# Altium PCB gecko3.PcbDoc (part 1 of 8)
Units mm, origin at the board's own origin, x right, y up, seen from the top; angles counter-clockwise.
Board outline 85.5 x 54.02 mm, 10 copper layers (Top Layer, MidLayer1, 1.2 & 2.5V Plane, GND Plane1, DDR layer 1, 3.3V Plane, DDR layer 2, GND Plane2, MidLayer2, Bottom Layer), stack 1.39 mm thick; 295 components, 567 nets, 2310 pads, 1568 vias.
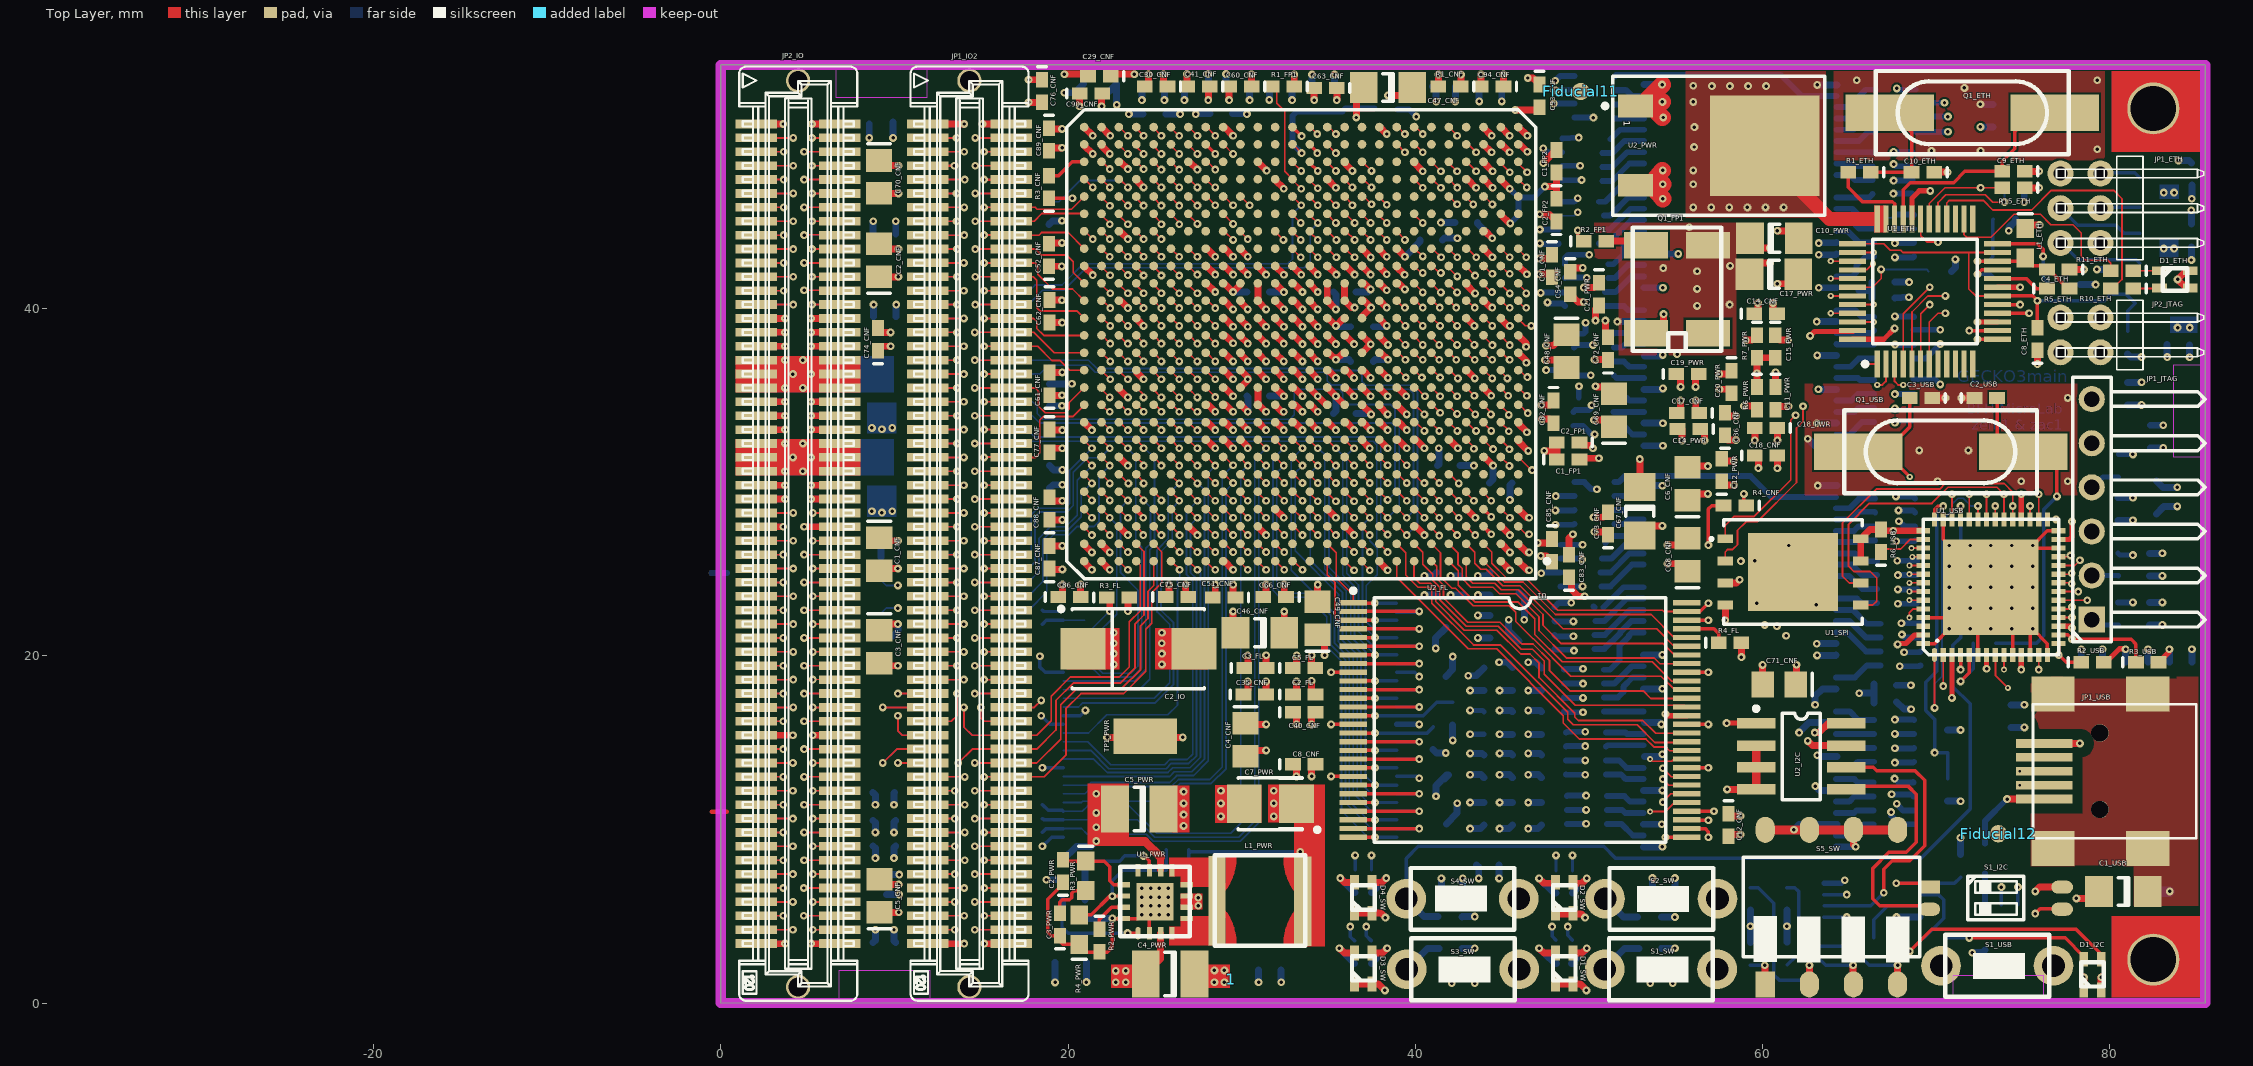
[diagram p0: Top Layer view]
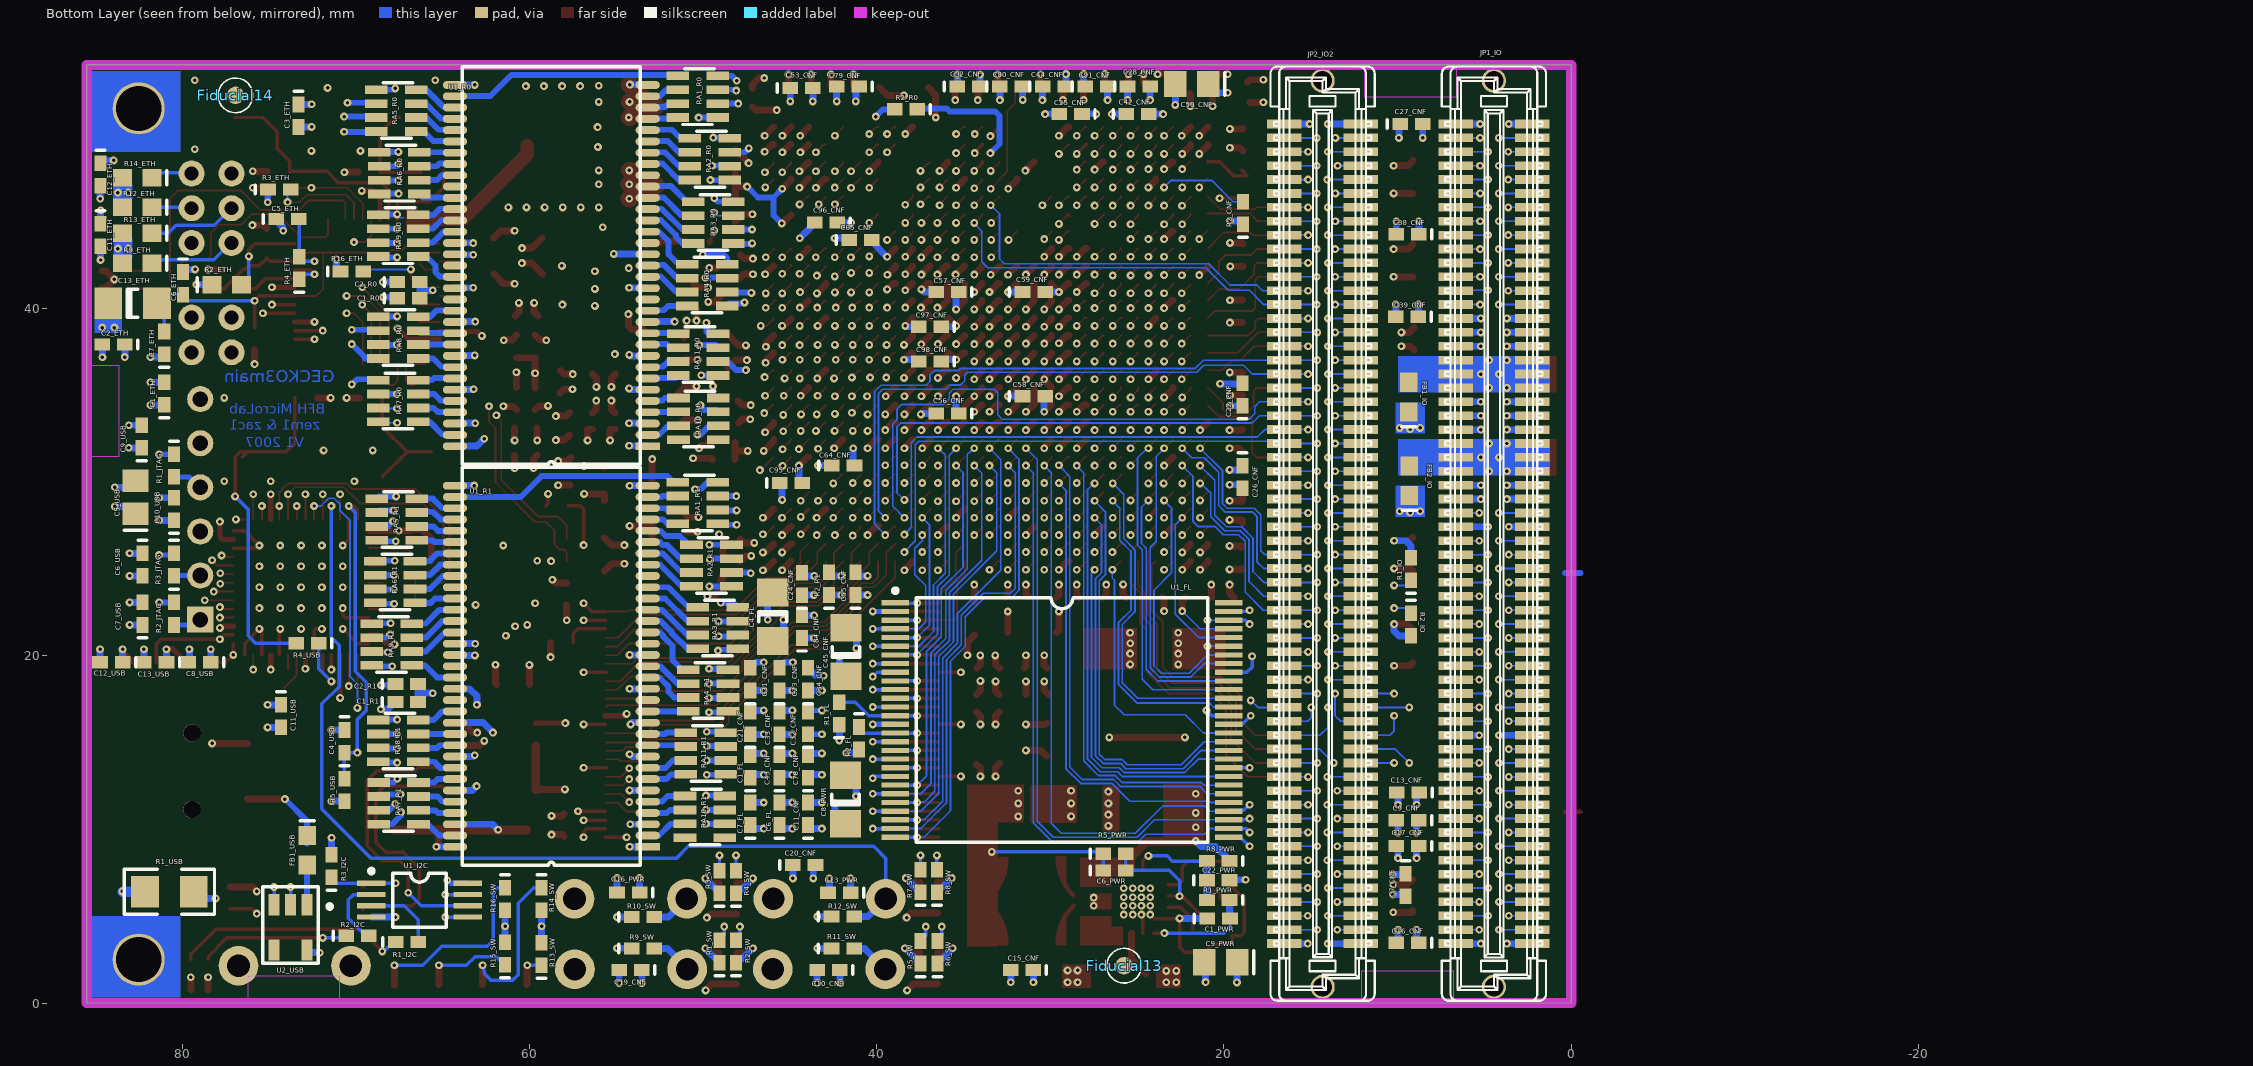
[diagram p1: Bottom Layer view, seen from below]
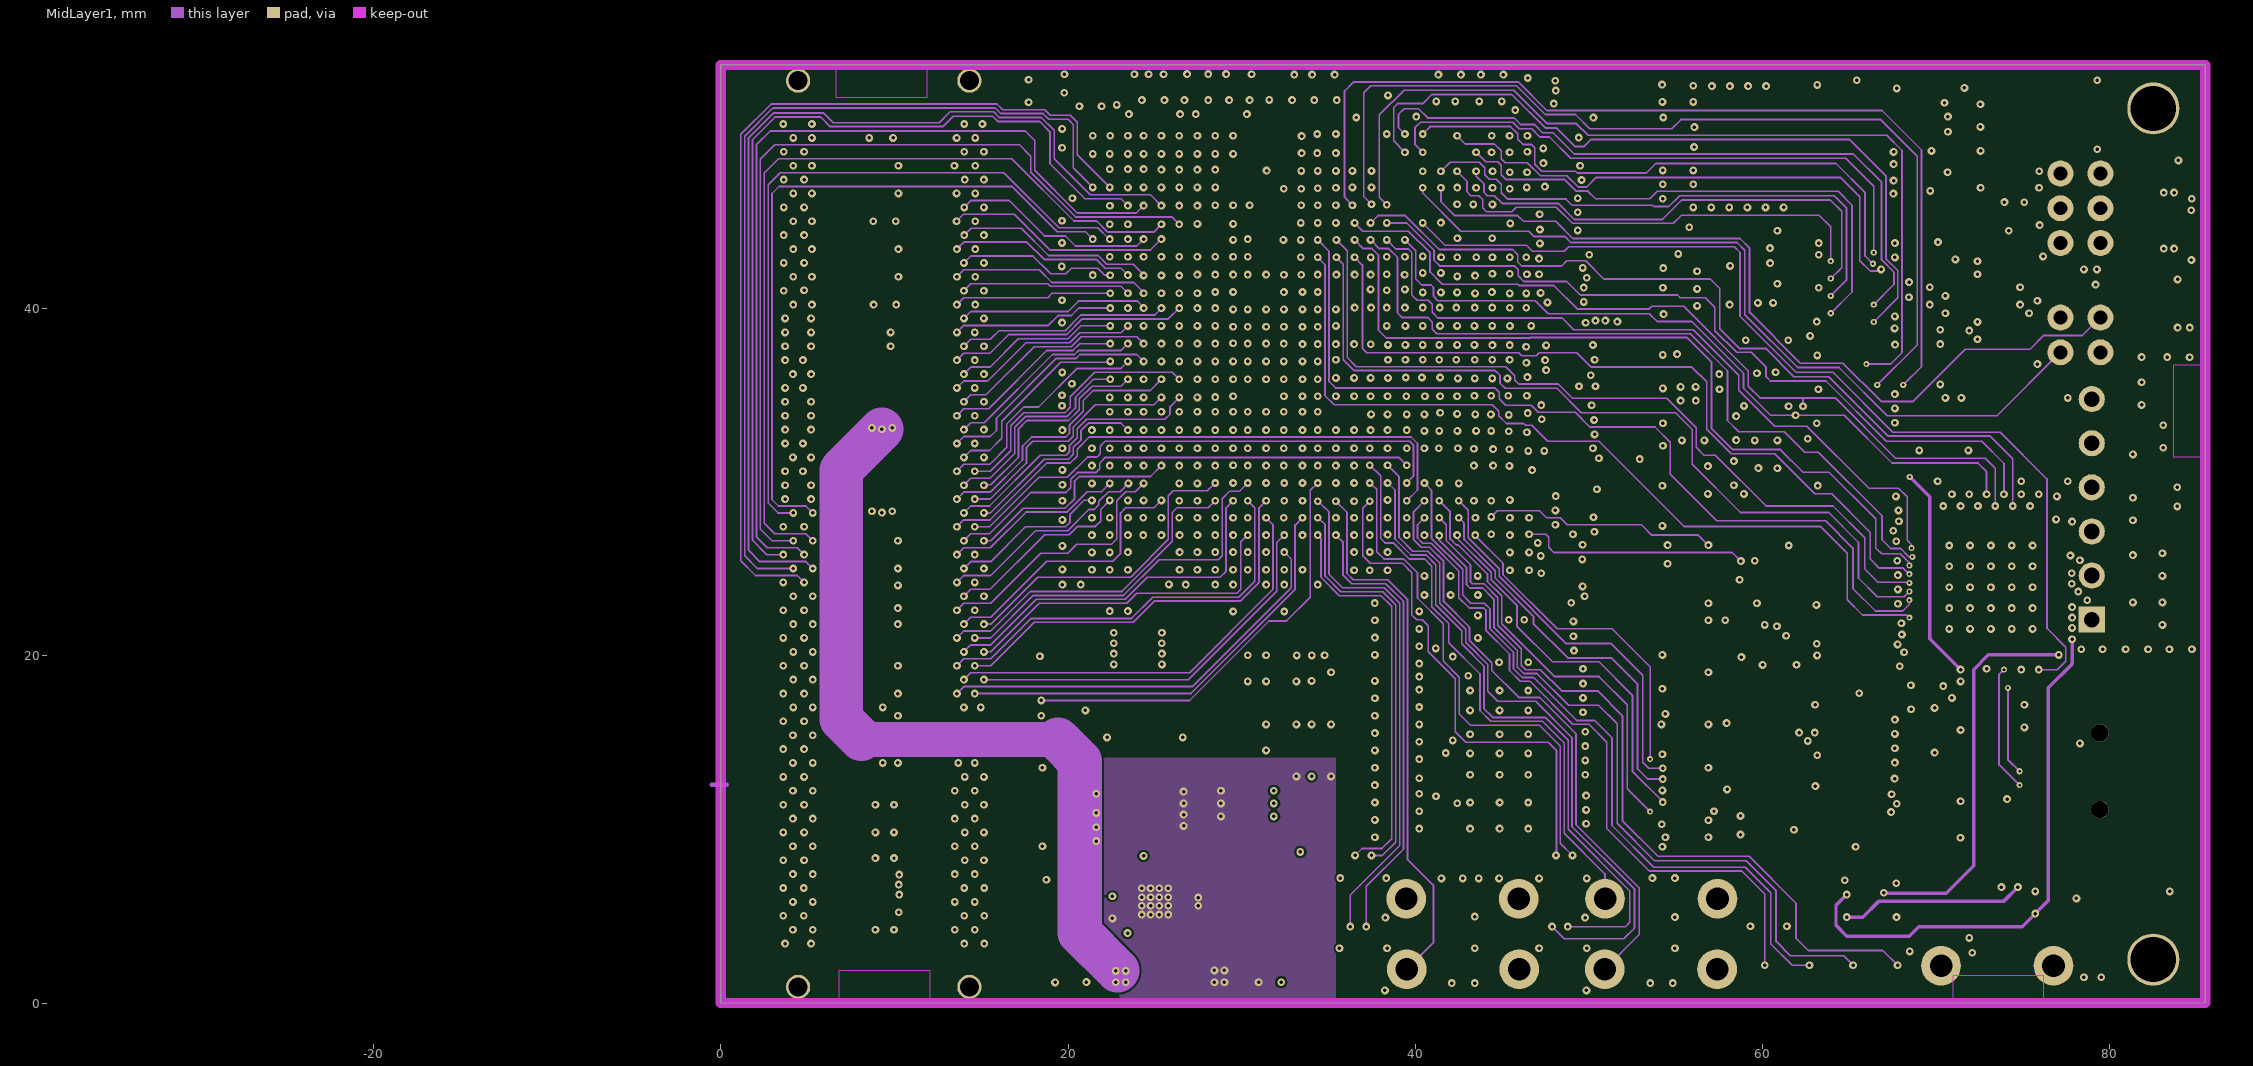
[diagram p2: MidLayer1]
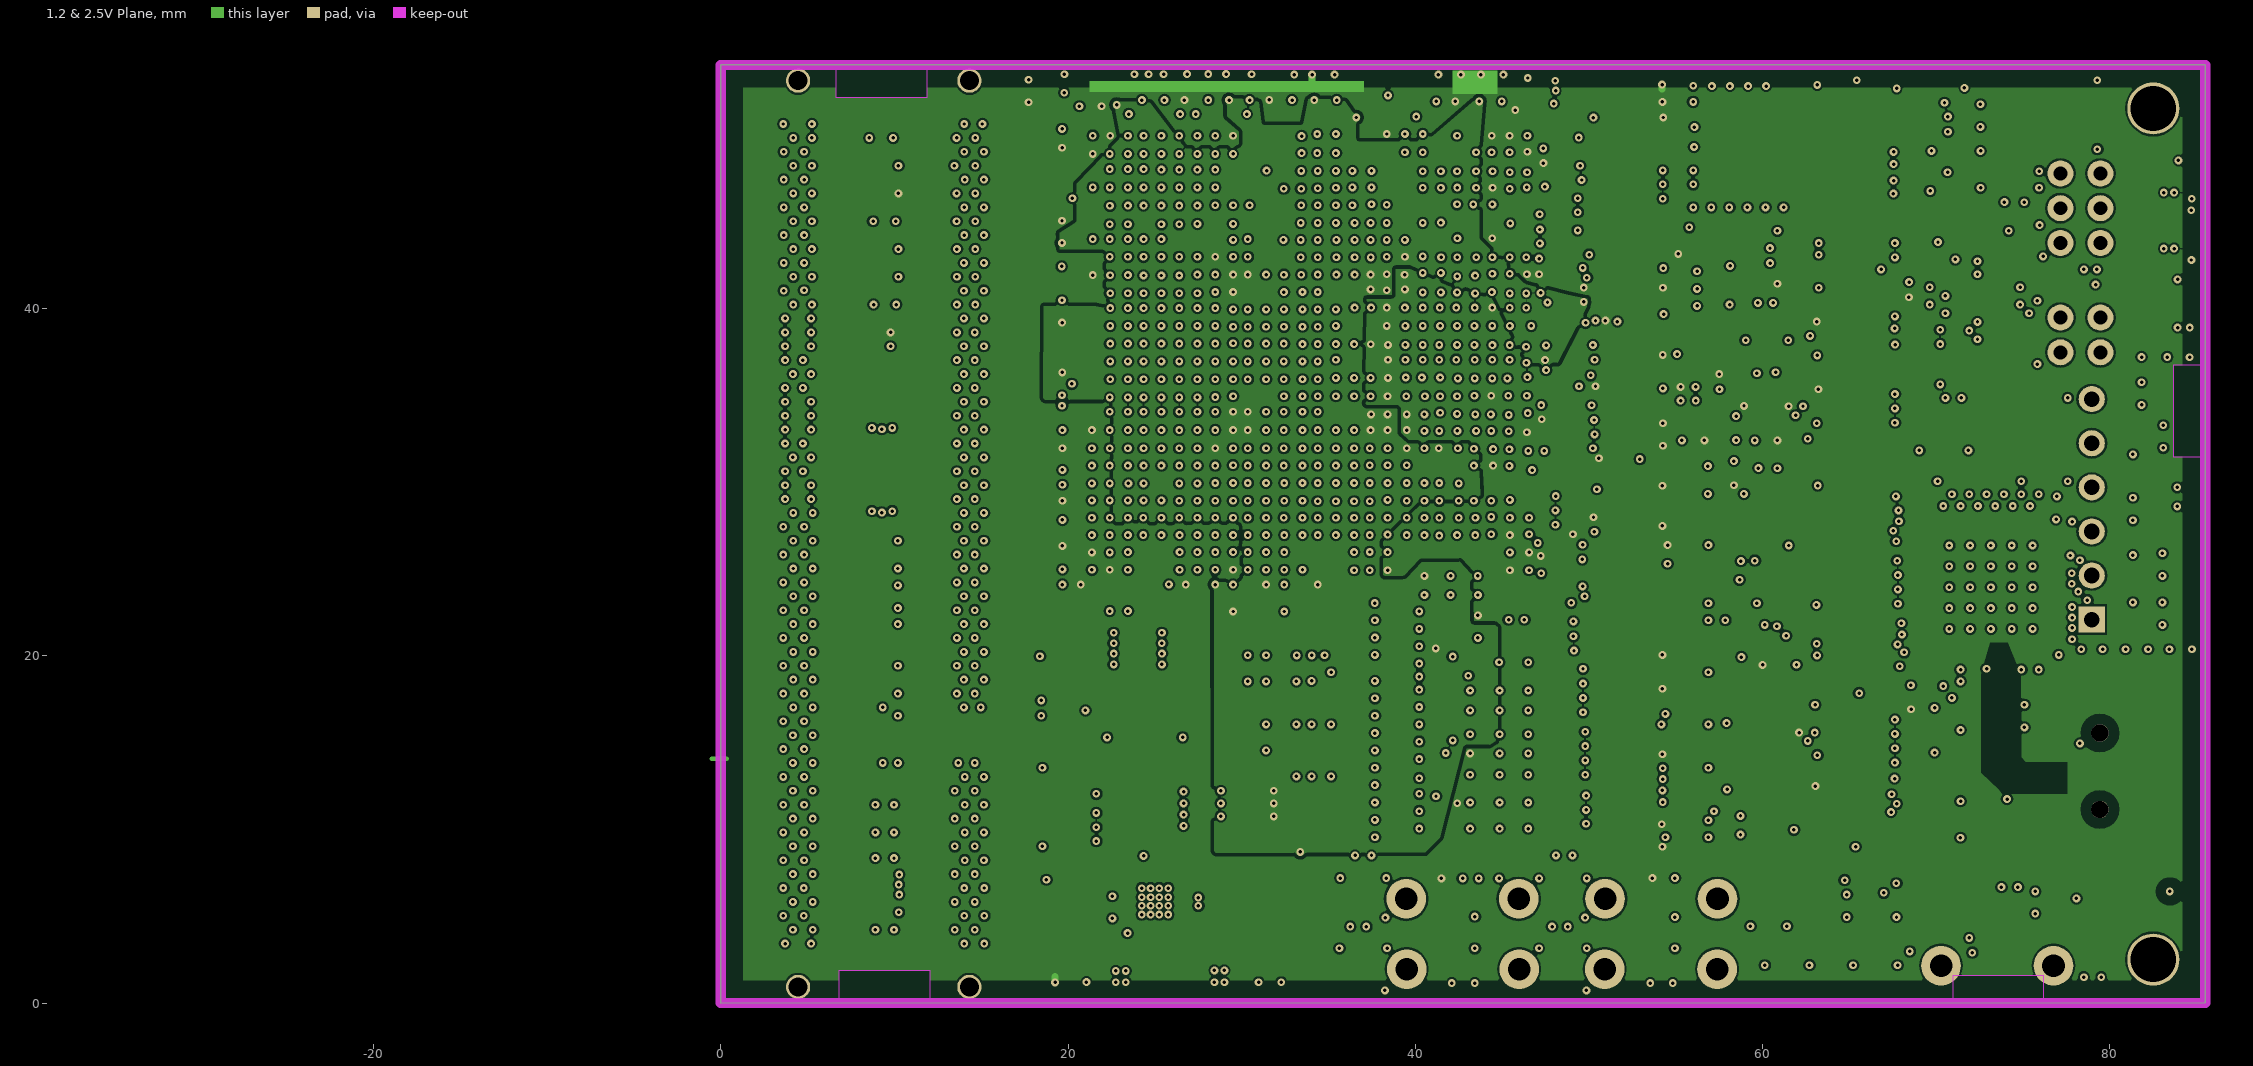
[diagram p3: 1.2 & 2.5V Plane]
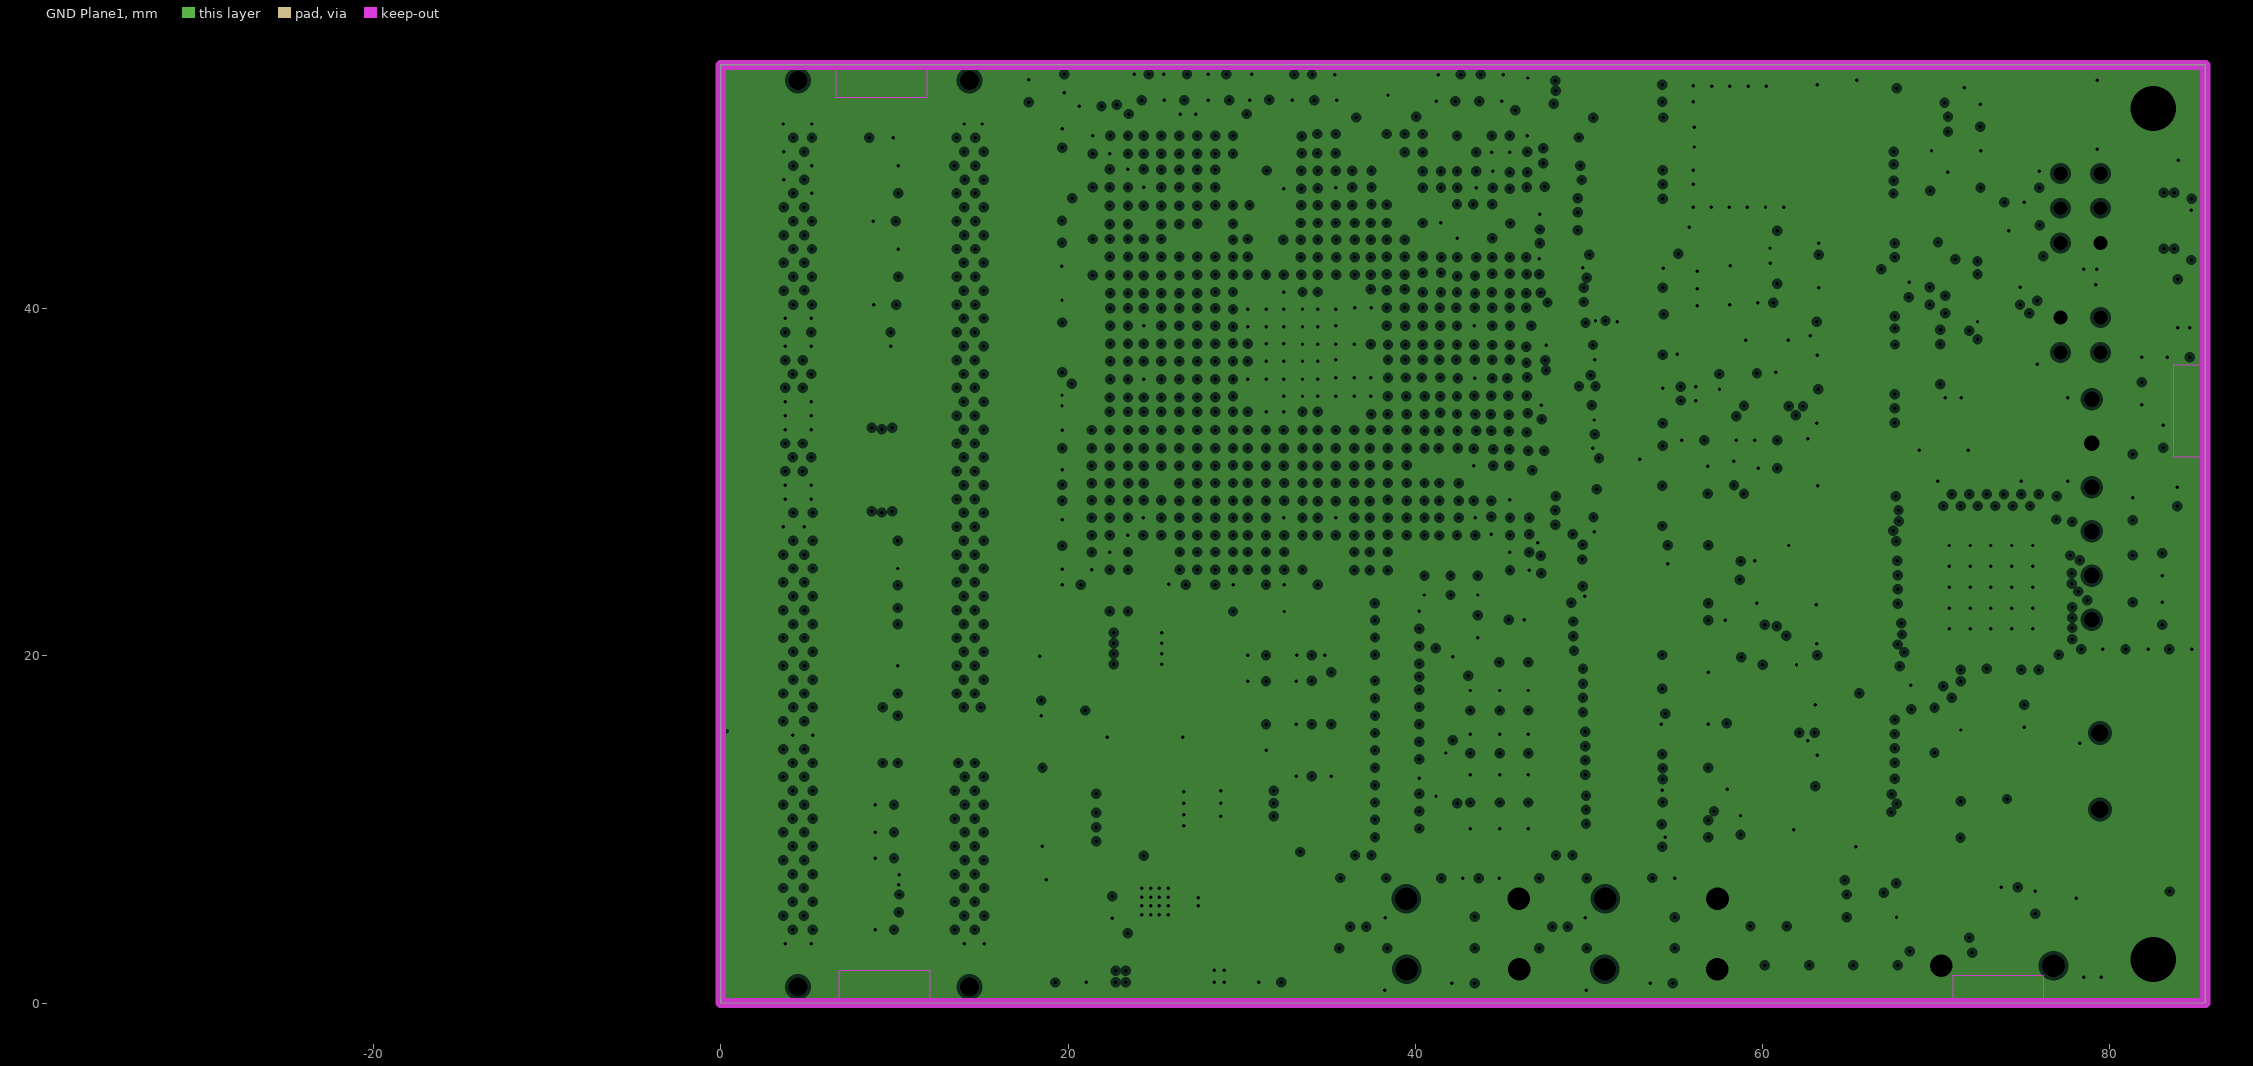
[diagram p4: GND Plane1, clearances drawn from the general rule]
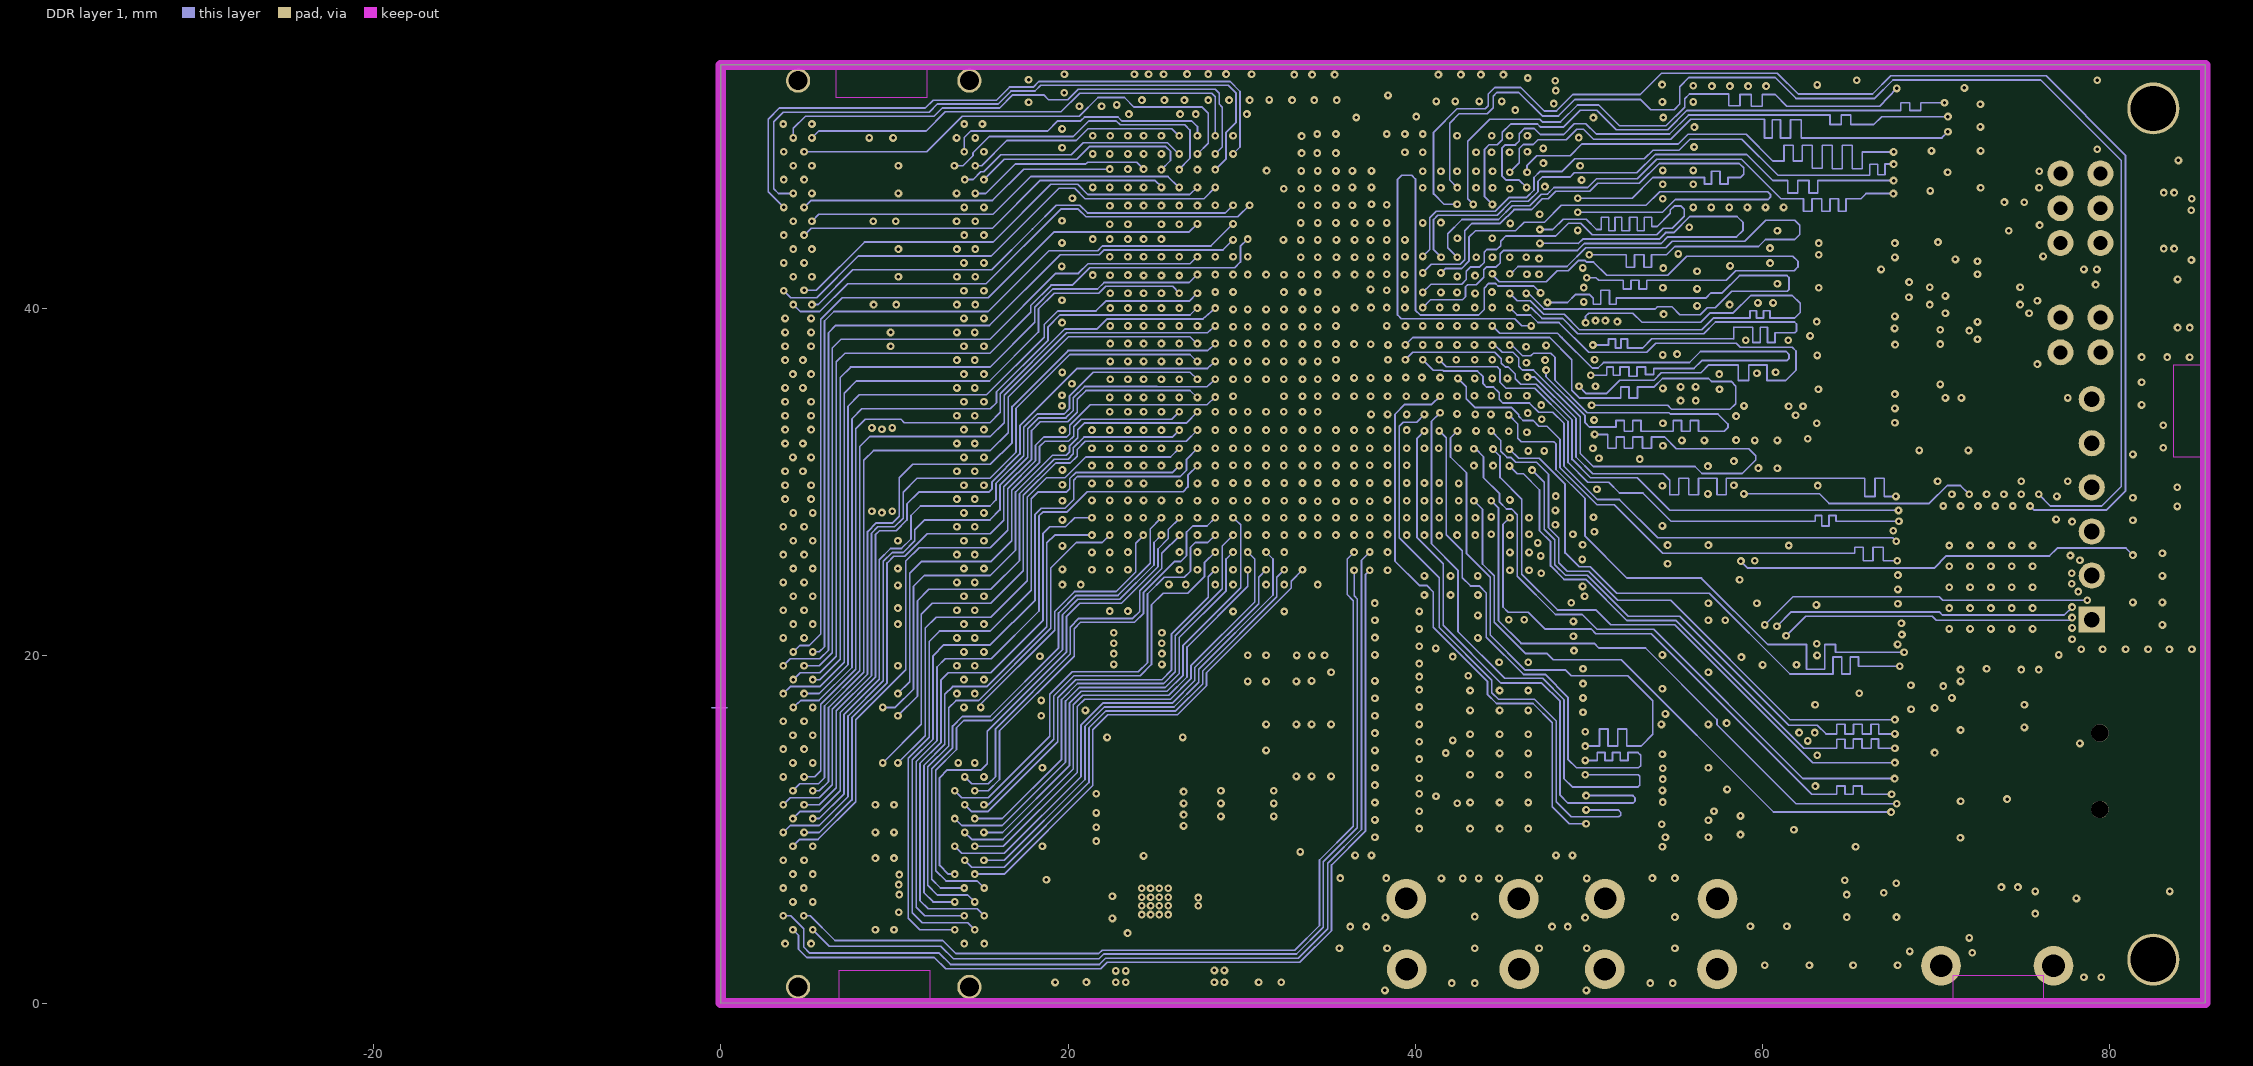
[diagram p5: DDR layer 1]
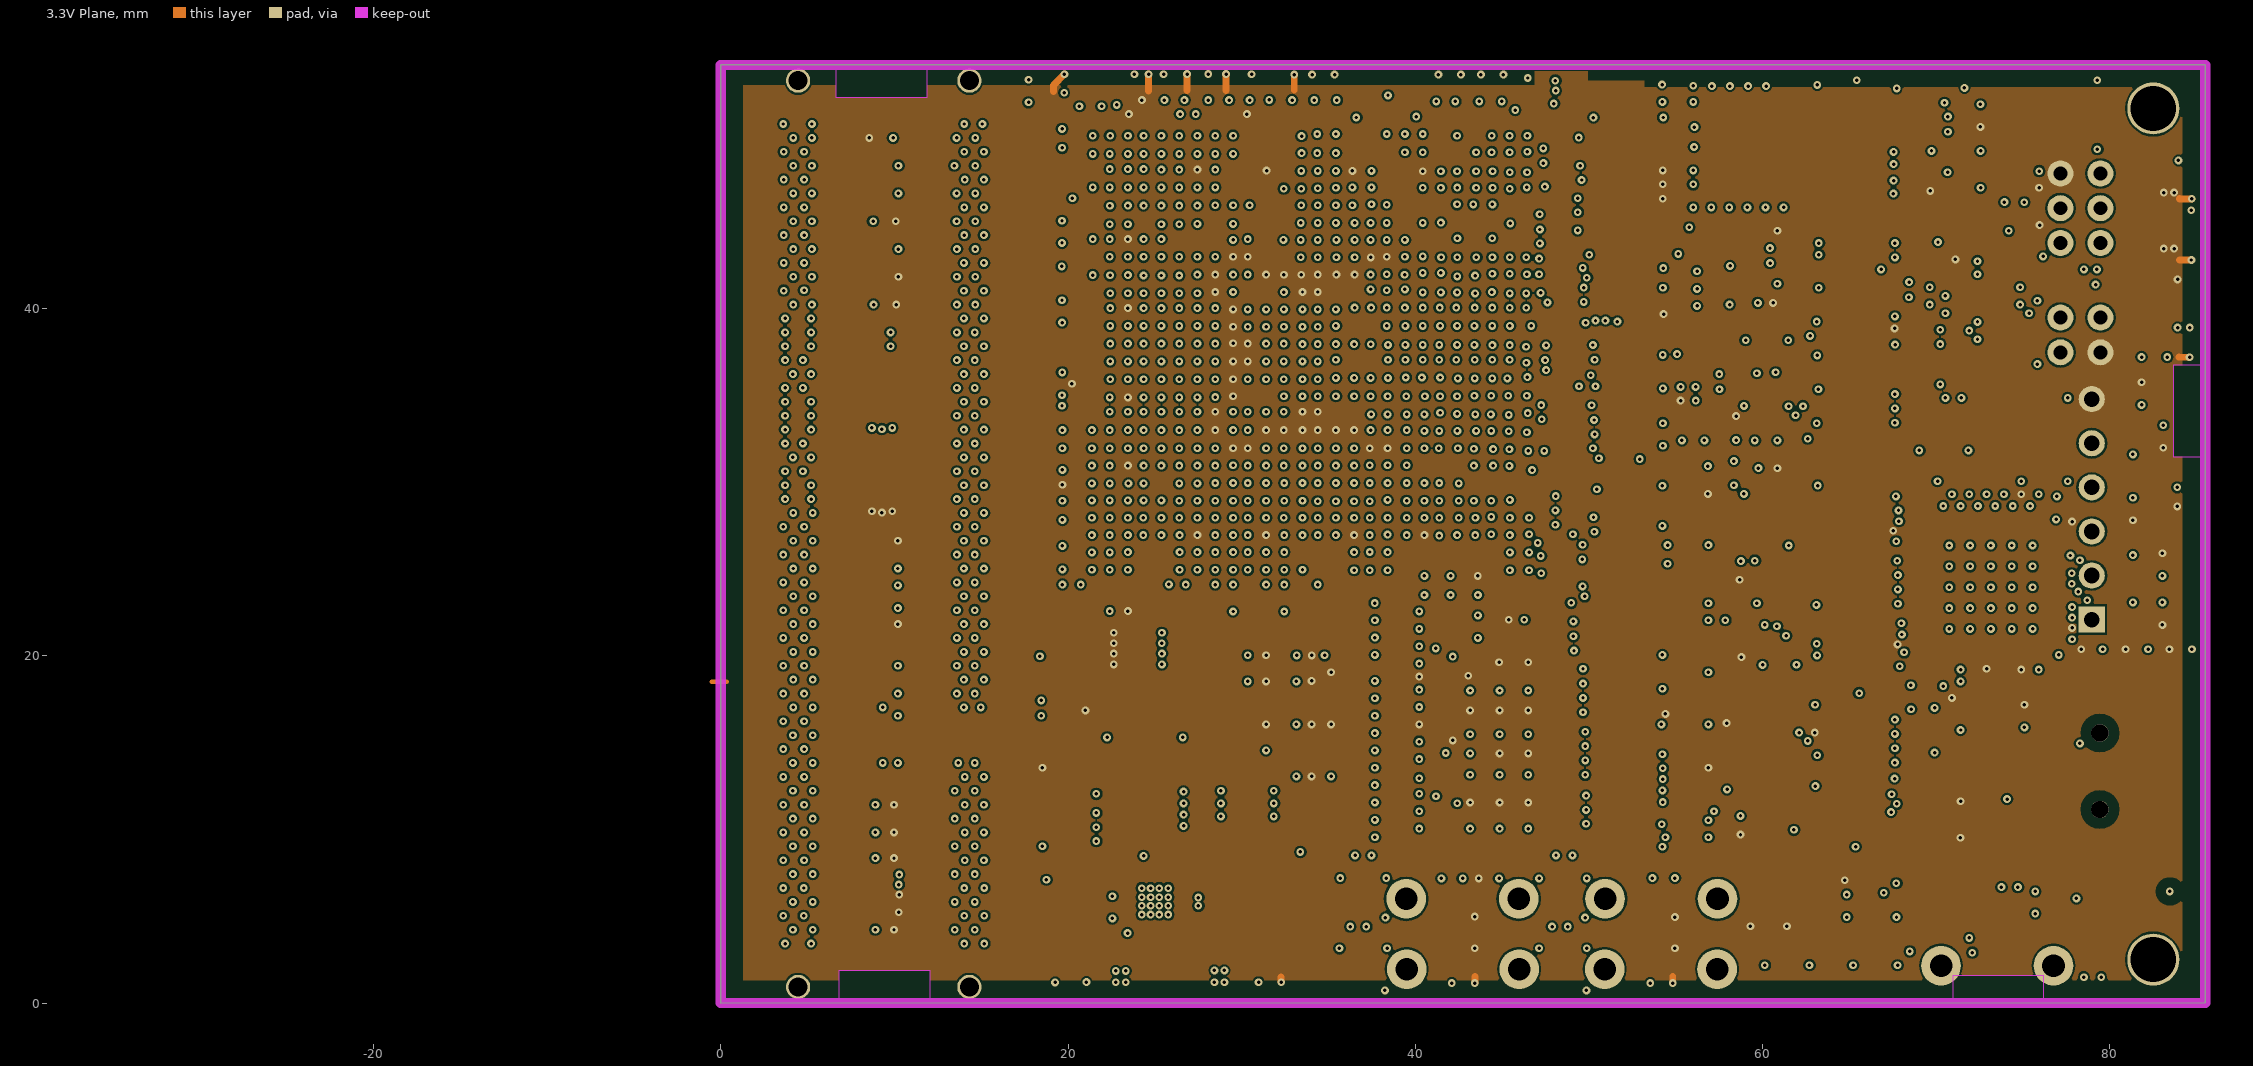
[diagram p6: 3.3V Plane]
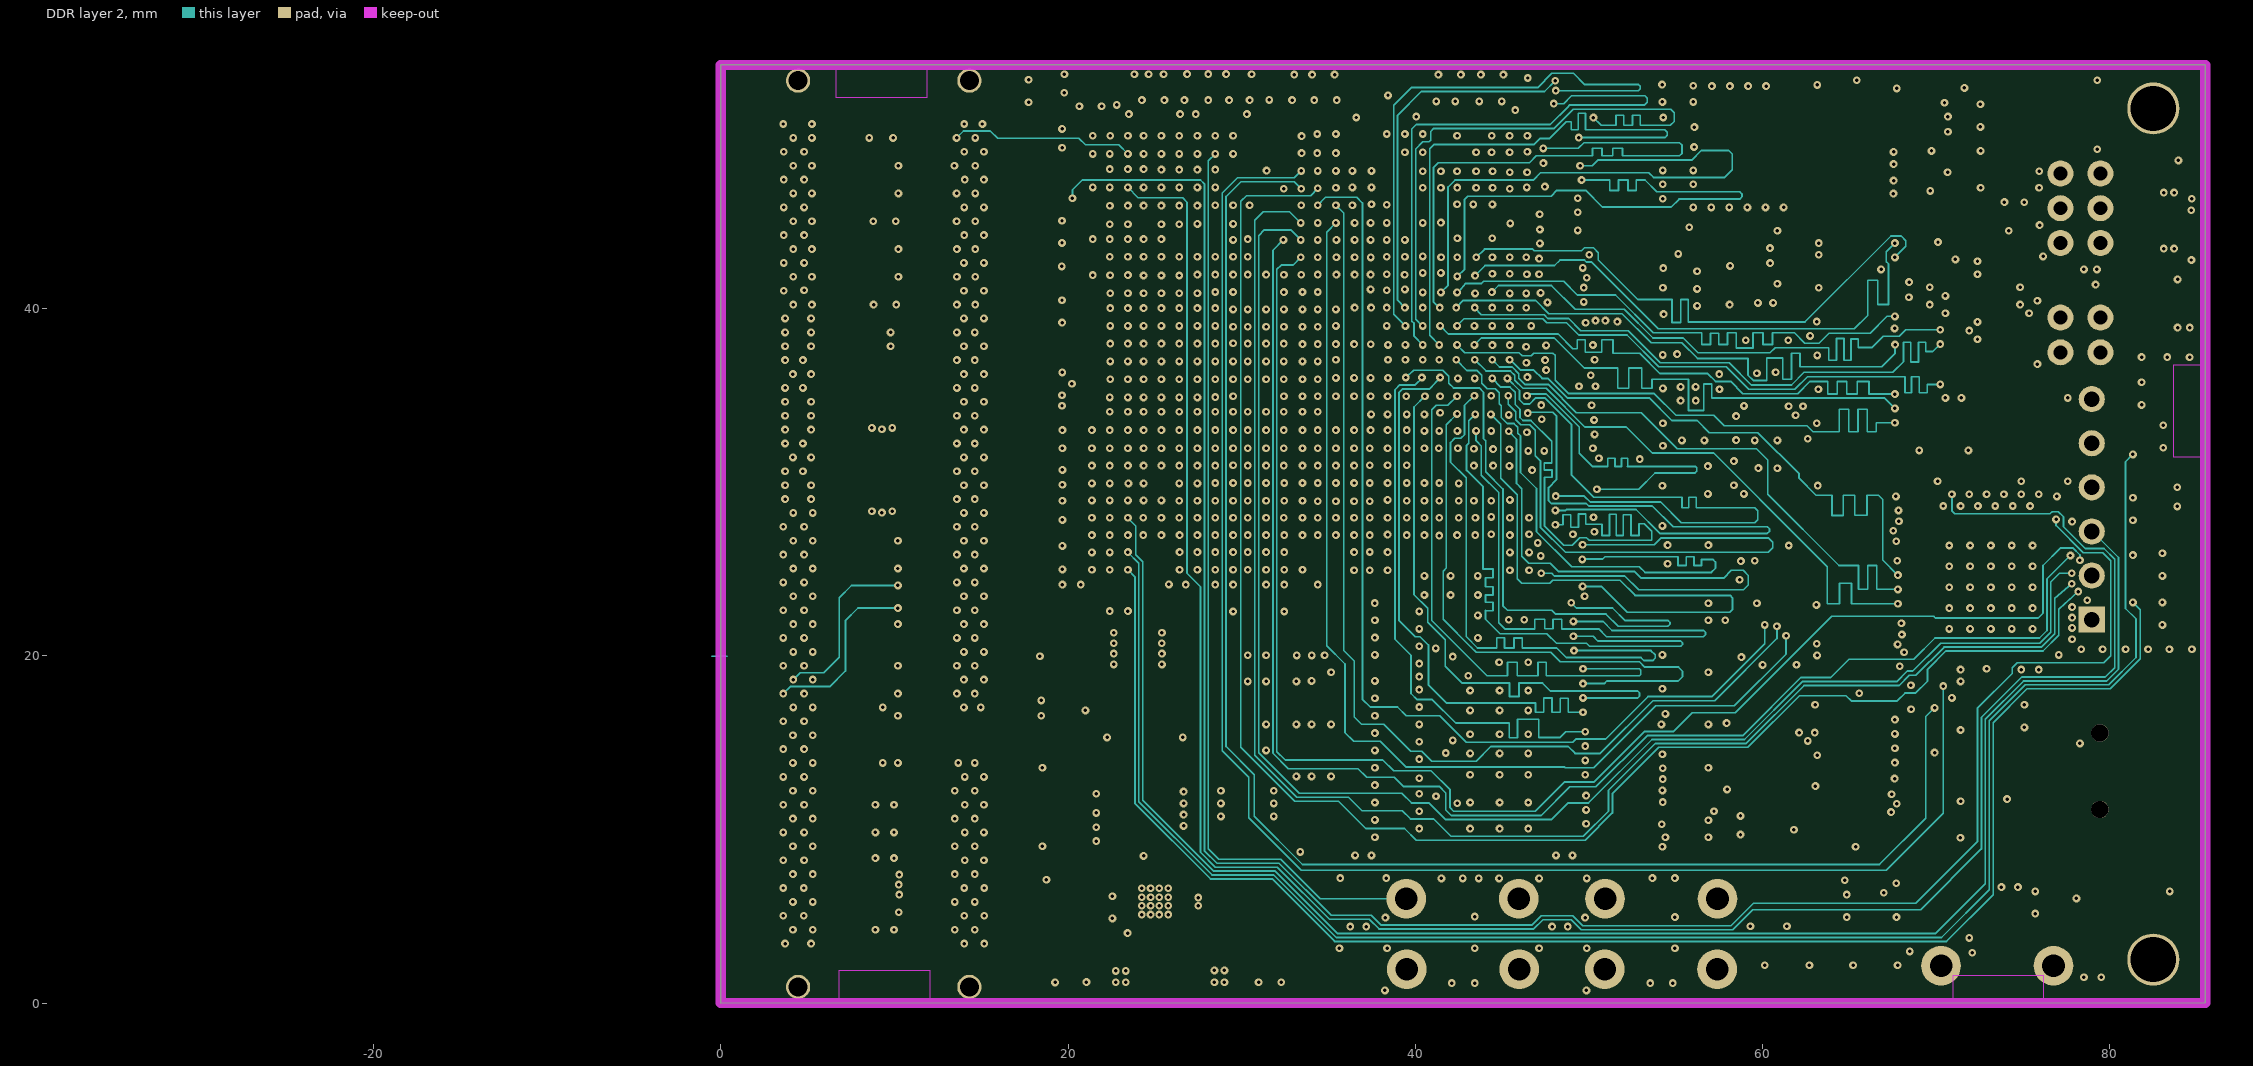
[diagram p7: DDR layer 2]
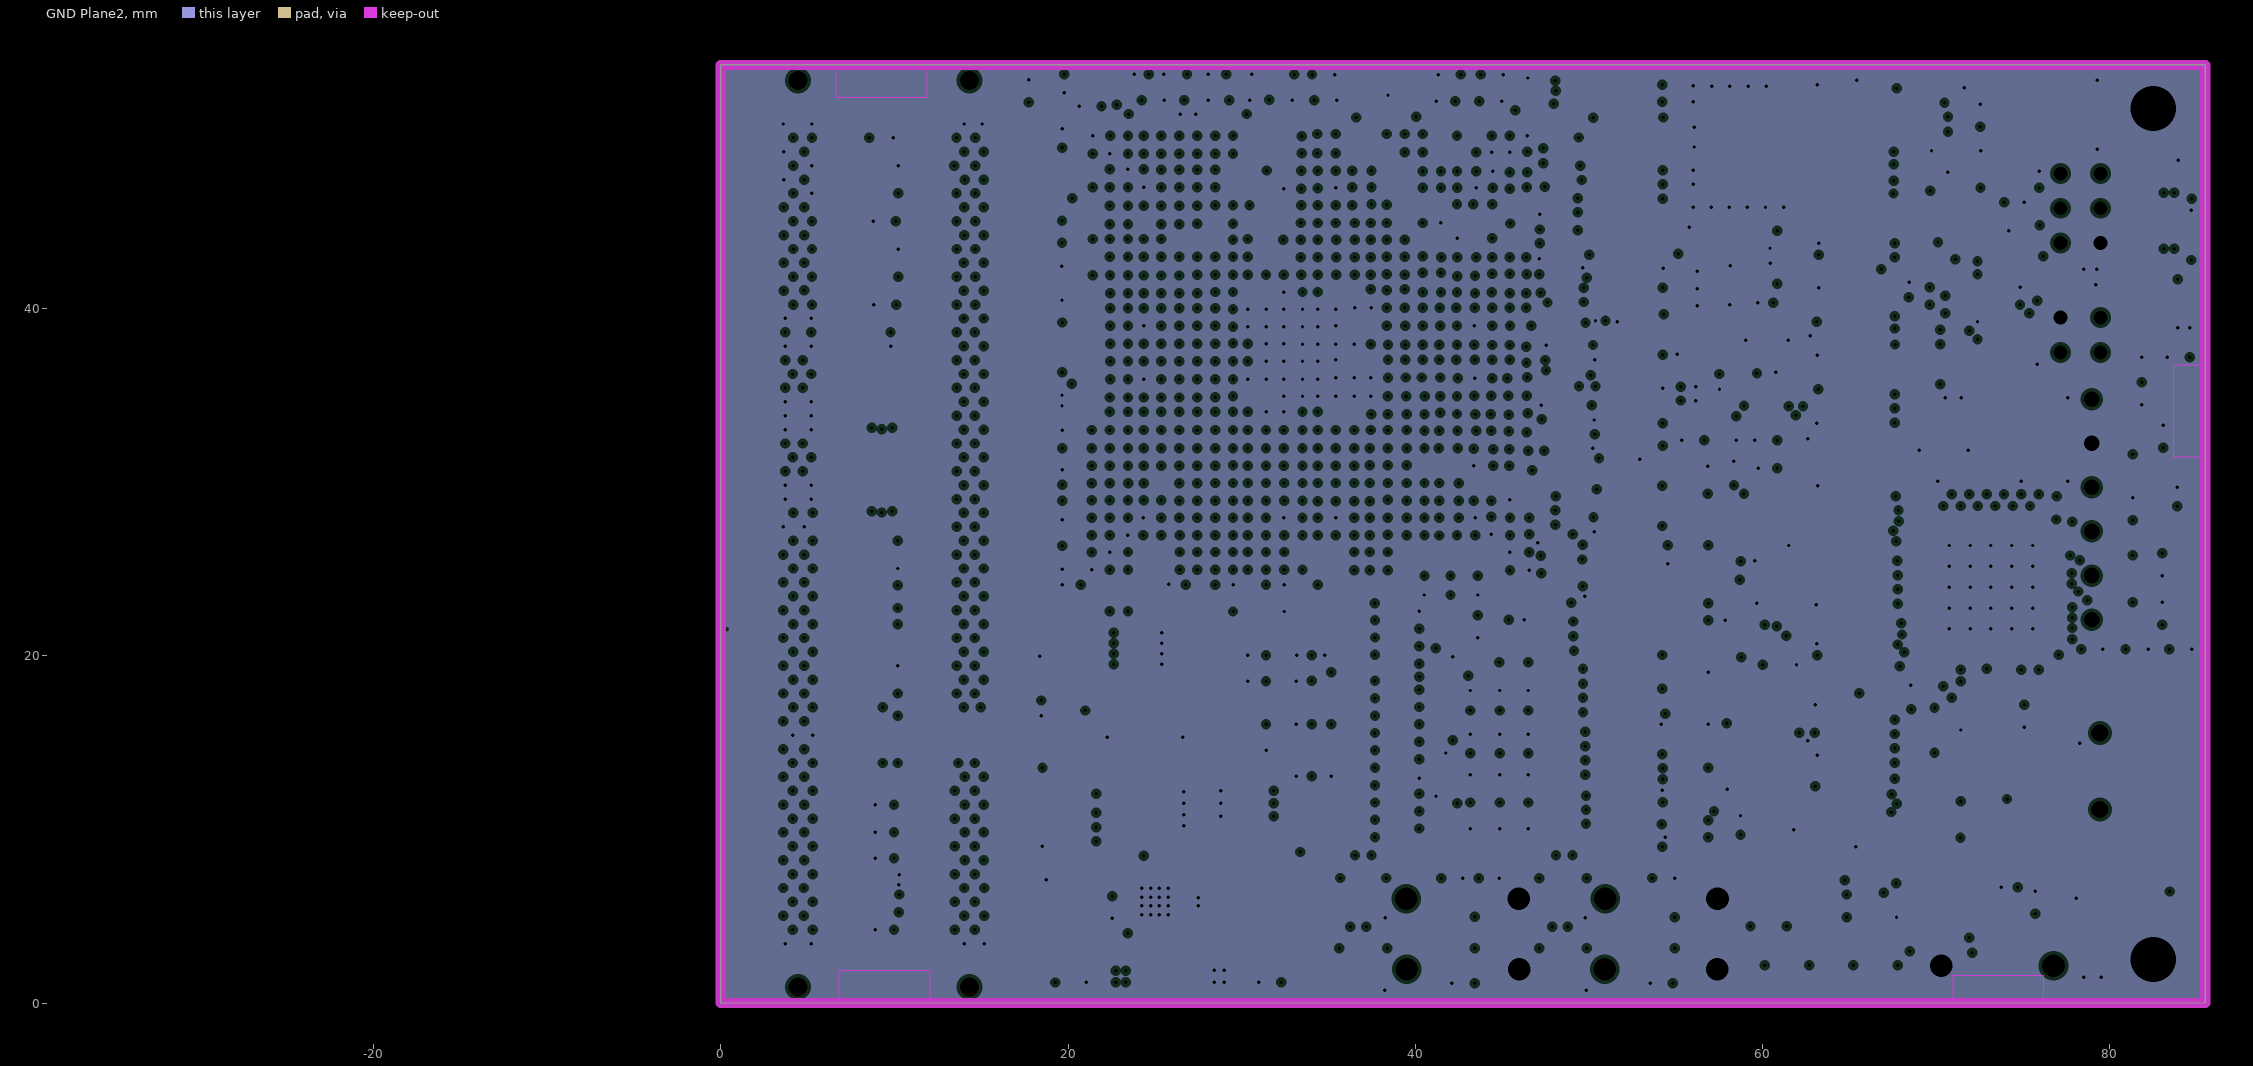
[diagram p8: GND Plane2, clearances drawn from the general rule]
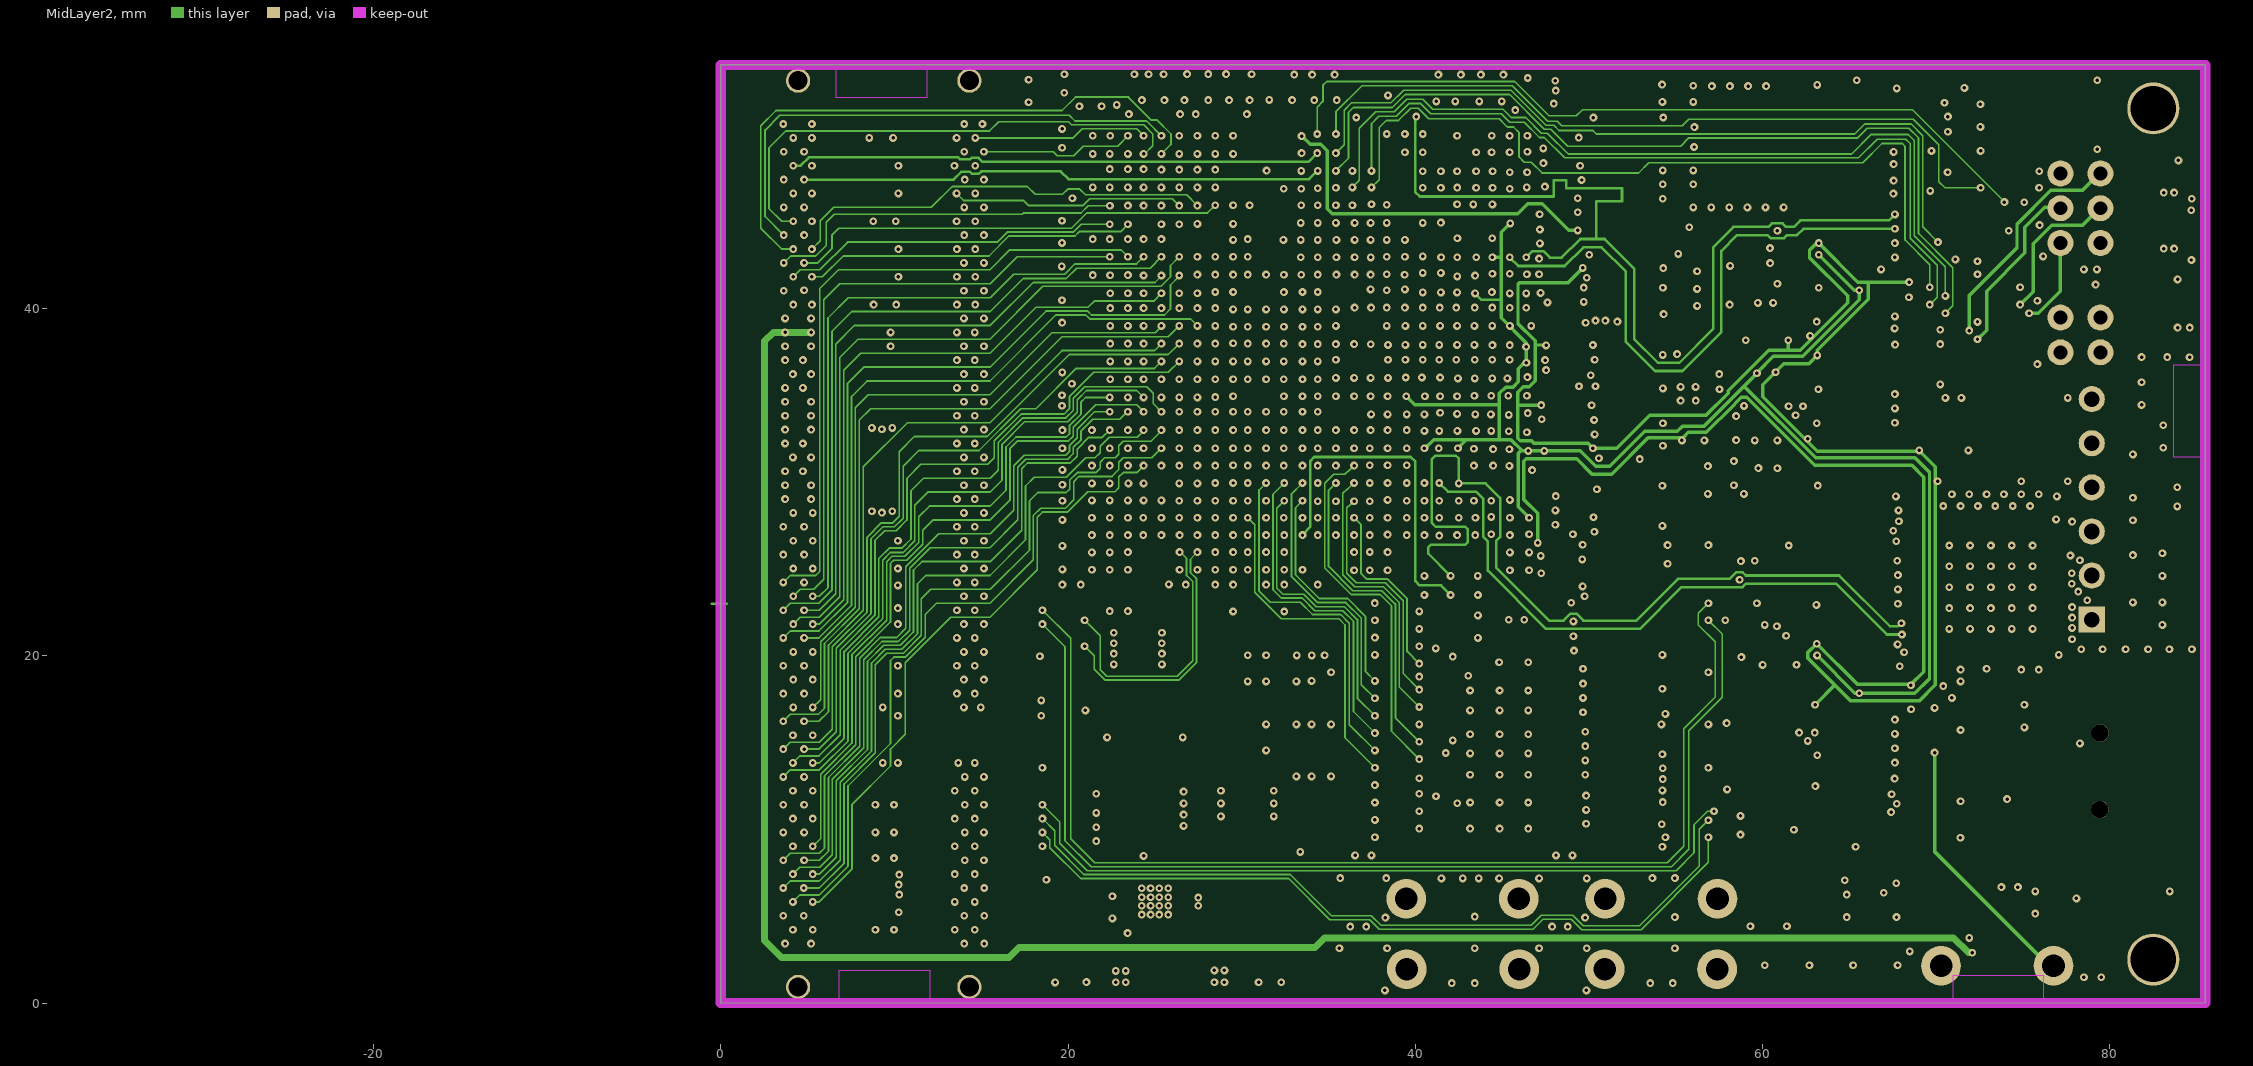
[diagram p9: MidLayer2]

## Layer stack, top to bottom
Top Layer: signal copper 0.018
Dielectric: prepreg 0.11, FR-4, Dk 4.8
MidLayer1: signal copper 0.018
Dielectric: core 0.1, FR-4, Dk 4.8
1.2 & 2.5V Plane: signal copper 0.018
Dielectric: prepreg 0.13, FR-4, Dk 4.8
GND Plane1: plane copper 0.018, net GND
Dielectric: core 0.2, FR-4, Dk 4.8
DDR layer 1: signal copper 0.018
Dielectric: prepreg 0.13, FR-4, Dk 4.8
3.3V Plane: signal copper 0.018
Dielectric: core 0.2, FR-4, Dk 4.8
DDR layer 2: signal copper 0.018
Dielectric: prepreg 0.13, FR-4, Dk 4.8
GND Plane2: plane copper 0.018, net GND
Dielectric: core 0.1, FR-4, Dk 4.8
MidLayer2: signal copper 0.018
Dielectric: prepreg 0.11, FR-4, Dk 4.8
Bottom Layer: signal copper 0.018

## Board outline
0,0 0,54.025 85.5,54.025 85.5,0.025

## Design rules (kind name [scope] priority, off if disabled: settings)
Clearance Clearance_keepout [OnLayer('Keep-Out Layer')] p1: gap=0
Clearance Clearance_earth [InNet('EARTH')] p2: gap=0.6
Clearance Clearance_plane [InNet('1.2V') vs InNet('2.5V')] p3: gap=0.2
Clearance Clearance_1 [All] p4: gap=0.125
ComponentClearance [OnLayer('Multi-Layer')] p1: gap=0.2 collisioncheckmode=3 verticalgap=0
ComponentClearance ComponentClearanceBottom [OnLayer('Bottom Layer') vs OnLayer('Bottom Layer')] p2: gap=0.2 collisioncheckmode=2 verticalgap=0.254
ComponentClearance ComponentClearanceTop [OnLayer('Top Layer') vs OnLayer('Top Layer')] p3: gap=0.2 collisioncheckmode=2 verticalgap=0.254
DiffPairsRouting [All] p1: maxlimit=0.6 minlimit=0.254 mostfreqgap=0.254 toplayer_maxgap=0.254 midlayer1_mingap=0.48 midlayer1_maxgap=0.52 midlayer1_prefgap=0.5 midlayer2_maxgap=0.254 midlayer3_maxgap=0.254 midlayer4_maxgap=0.254 midlayer6_maxgap=0.254 midlayer8_mingap=0.4 midlayer8_prefgap=0.475 bottomlayer_maxgap=0.254 maxuncoupledlength=12.7
Height Height_connector [InComponentClass('io-bus') Or InComponentClass('io-bus2')] p1: minheight=0 maxheight=25.4 prefheight=12.7
Height "Height on back side" [OnLayer('Bottom Layer')] p2: minheight=0 maxheight=2 prefheight=1
HoleSize [All] p1: absolutevalues=TRUE maxlimit=5 minlimit=0.15 maxpercent=80.000 minpercent=20.000
MatchedLengths "Schematic Matched Net Lengths_4" [InNetClass('ram')] p1: tolerance=3.6 checknetsindiffpair=TRUE checkdiffpairvsdiffpair=TRUE checkothers=TRUE
MatchedLengths "Schematic Matched Net Lengths_3" [InNetClass('ram')] p2: tolerance=3.6 checknetsindiffpair=TRUE checkdiffpairvsdiffpair=TRUE checkothers=TRUE
MatchedLengths "Schematic Matched Net Lengths_2" [InNetClass('ram-clock')] p3: tolerance=1 checknetsindiffpair=TRUE checkdiffpairvsdiffpair=TRUE checkothers=TRUE
MatchedLengths "Schematic Matched Net Lengths_1" [InNetClass('ram-clock')] p4: tolerance=1 checknetsindiffpair=TRUE checkdiffpairvsdiffpair=TRUE checkothers=TRUE
MatchedLengths "Schematic Matched Net Lengths" [InNetClass('usb-d')] p5: tolerance=1 checknetsindiffpair=TRUE checkdiffpairvsdiffpair=TRUE checkothers=TRUE
MaxMinImpedance "Schematic Impedance Constraint_4" [InNetClass('usb-d')] p1: minimum=79.00 maximum=100.0
MaxMinImpedance "Schematic Impedance Constraint_3" [InNetClass('ram')] p2: minimum=40.00 maximum=70.00
MaxMinImpedance "Schematic Impedance Constraint_2" [InNetClass('ram')] p3: minimum=40.00 maximum=70.00
MaxMinImpedance "Schematic Impedance Constraint_1" [InNetClass('ram-clock')] p4: minimum=40.00 maximum=70.00
MaxMinImpedance "Schematic Impedance Constraint" [InNetClass('ram-clock')] p5: minimum=40.00 maximum=70.00
MaximumViaCount "Schematic Maximum Via Count Constraint_3" [InNetClass('ram-clock')] p1: limit=2
MaximumViaCount "Schematic Maximum Via Count Constraint_2" [InNetClass('ram-clock')] p2: limit=2
MaximumViaCount "Schematic Maximum Via Count Constraint_1" [InNetClass('ram')] p3: limit=2
MaximumViaCount "Schematic Maximum Via Count Constraint" [InNetClass('ram')] p4: limit=2
OvershootFalling "Schematic Overshoot - Falling Edge_3" [InNetClass('ram')] p1: maximum=300.0m
OvershootFalling "Schematic Overshoot - Falling Edge_2" [InNetClass('ram-clock')] p2: maximum=300.0m
OvershootFalling "Schematic Overshoot - Falling Edge_1" [InNetClass('ram-clock')] p3: maximum=300.0m
OvershootFalling "Schematic Overshoot - Falling Edge" [InNetClass('ram')] p4: maximum=300.0m
OvershootRising "Schematic Overshoot - Rising Edge_3" [InNetClass('ram-clock')] p1: maximum=300.0m
OvershootRising "Schematic Overshoot - Rising Edge_2" [InNetClass('ram')] p2: maximum=300.0m
OvershootRising "Schematic Overshoot - Rising Edge_1" [InNetClass('ram-clock')] p3: maximum=300.0m
OvershootRising "Schematic Overshoot - Rising Edge" [InNetClass('ram')] p4: maximum=300.0m
PlaneClearance [All] p1: clearance=0.2
PlaneConnect [All] p1: planeconnectstyle=Direct reliefexpansion=0.508 reliefentries=4 reliefconductorwidth=0.254 reliefairgap=0.254
PolygonConnect [All] p1: connectstyle=Direct reliefconductorwidth=0.254 reliefentries=4 polygonreliefangle="90 Angle"
RoomDefinition dram2 [InComponentClass('dram2')] p1: confinementstyle=ConfineIn formatcopy=TRUE lockcomponents=FALSE outline 42.122,21.167 42.122,24.335 48.197,30.75 52.082,31.225 65.39,31.225 69.75,29.8 70.05,22.6 70.05,18.692 69.65,9.542 65.39,7.567 52.082,7.567 47.772,8.767
RoomDefinition dram1 [InComponentClass('dram1')] p2: confinementstyle=ConfineIn formatcopy=TRUE lockcomponents=FALSE outline 36.557,50.807 36.557,52.135 48.197,54.15 52.082,54.3 65.39,54.3 69.775,53.35 69.775,49.442 69.675,32.717 65.39,30.642 52.082,30.642 48.147,31.692
RoomDefinition power [InComponentClass('power')] p3: confinementstyle=ConfineIn formatcopy=TRUE lockcomponents=FALSE outline 17.921,1.286 17.921,3.414 18.571,8.839 24.369,17.456 50.421,53.729 63.929,53.729 63.929,45.021 61.954,32.461 55.714,5.711 28.389,0.011 23.361,0.011
RoomDefinition io-bus2 [InComponentClass('io-bus2')] p4: confinementstyle=ConfineIn formatcopy=TRUE lockcomponents=FALSE outline 10.404,-0.186 10.404,54.249 10.804,54.25 17.832,54.25 18.232,54.249 18.232,-0.186
RoomDefinition io-bus [InComponentClass('io-bus')] p5: confinementstyle=ConfineIn formatcopy=TRUE lockcomponents=FALSE outline 0.536,-0.186 0.536,54.248 0.936,54.249 7.964,54.249 8.364,54.248 28.863,23.2 28.863,17.742 8.364,-0.186
RoomDefinition ethernet [InComponentClass('ethernet')] p6: confinementstyle=ConfineIn formatcopy=TRUE lockcomponents=FALSE outline 64.086,35.711 64.086,46.239 64.161,48.564 64.611,53.781 79.839,53.781 85.37,49.476 85.704,49.129 85.704,42.546 85.364,37.261 81.689,33.621 80.361,33.621
RoomDefinition flash [InComponentClass('flash') vs False] p7: confinementstyle=ConfineIn formatcopy=TRUE lockcomponents=FALSE outline 18.611,8.896 18.611,24.254 44.767,24.758 47.195,24.758 56.739,24.254 59.539,21.414 59.539,20.086 56.739,8.896
RoomDefinition switches [InComponentClass('switches')] p8: confinementstyle=ConfineIn formatcopy=TRUE lockcomponents=FALSE outline 35.836,1.171 35.836,4.339 35.861,8.439 58.527,11.033 69.4,11.033 69.4,0.005 58.834,-0.209 38.043,-0.209 35.936,0.361
RoomDefinition i2c [InComponentClass('i2c')] p9: confinementstyle=ConfineIn formatcopy=TRUE lockcomponents=FALSE outline 58.216,11.346 58.216,17.459 66.226,17.459 78.231,7.414 80.364,3.264 80.364,0.011 78.236,0.011 65.636,3.086 62.386,4.371
RoomDefinition jtag [InComponentClass('jtag')] p10: confinementstyle=ConfineIn formatcopy=TRUE lockcomponents=FALSE outline 76.086,36.171 76.086,40.779 85.704,40.779 85.834,36.404 85.834,20.456 77.496,20.456
RoomDefinition spi-flash [InComponentClass('spi-flash')] p11: confinementstyle=ConfineIn formatcopy=TRUE lockcomponents=FALSE outline 56.621,21.421 56.621,28.254 66.479,28.254 66.479,21.421
RoomDefinition usb [InComponentClass('usb')] p12: confinementstyle=ConfineIn formatcopy=TRUE lockcomponents=FALSE outline 62.636,28.969 62.636,34.531 67.711,35.514 71.096,35.514 74.264,35.514 83.739,33.689 85.314,23.839 85.489,20.289 85.489,18.961 85.306,4.894 78.409,-0.284 69.018,-0.284
RoomDefinition fpga-config [InComponentClass('fpga-config')] p13: confinementstyle=ConfineIn formatcopy=TRUE lockcomponents=FALSE outline 7.646,11.461 7.646,12.789 7.671,44.939 7.786,51.289 8.034,54.038 17.836,54.279 19.164,54.279 40.939,53.939 47.139,53.779 61.589,40.164 61.614,32.189 61.614,30.861 55.589,1.236 10.214,-0.329 8.086,-0.329 7.671,2.811
RoomDefinition fpga1 [InComponentClass('fpga1')] p14: confinementstyle=ConfineIn formatcopy=TRUE lockcomponents=FALSE outline 19.573,24.095 19.573,51.803 31.621,53.156 34.831,53.156 48.081,51.803 58.474,45.047 58.474,37.173 48.081,24.095
RoomDefinition fpga2 [InComponentClass('fpga2')] p15: confinementstyle=ConfineIn formatcopy=TRUE lockcomponents=FALSE outline 47.092,46.727 47.092,49.937 48.503,49.937 48.509,47.117 48.509,43.907 47.097,43.907
RoutingVias [All] p1: holewidth=0.2 width=0.45 viastyle="Through Hole" minholewidth=0.15 minwidth=0.35 maxholewidth=1 maxwidth=2
SignalStimulus "Schematic Signal Stimulus_3" [InNetClass('ram')] p1: kind=2 level=0 starttime=0.000 stoptime=1.800n periodtime=3.600n
SignalStimulus "Schematic Signal Stimulus_2" [InNetClass('ram-clock')] p2: kind=2 level=0 starttime=0.000 stoptime=1.800n periodtime=3.600n
SignalStimulus "Schematic Signal Stimulus_1" [InNetClass('ram')] p3: kind=2 level=0 starttime=0.000 stoptime=1.800n periodtime=3.600n
SignalStimulus "Schematic Signal Stimulus" [InNetClass('ram-clock')] p4: kind=2 level=0 starttime=0.000 stoptime=1.800n periodtime=3.600n
SolderMaskExpansion [All] p1: expansion=0.102
SupplyNets "Schematic Supply Nets_4" [InNet('2.5V')] p1: voltage=2.500
SupplyNets "Schematic Supply Nets_5" [InNet('2.5V')] p2: voltage=2.500
SupplyNets "Schematic Supply Nets_2" [InNet('VREF')] p3: voltage=1.250
SupplyNets "Schematic Supply Nets_3" [InNet('VREF')] p4: voltage=1.250
SupplyNets "Schematic Supply Nets" [InNet('GND')] p5: voltage=0.000
SupplyNets "Schematic Supply Nets_1" [InNet('GND')] p6: voltage=0.000
TestPointUsage [All] p1: valid=0 allowmultiple=FALSE
Testpoint [All] p1: side=15 testpointundercomponent=TRUE minsize=1.016 maxsize=2.54 preferedsize=1.524 minholesize=0 maxholesize=1.016 preferedholesize=0.813 testpointgrid=0.025 style=1023 order=0-112345678
UndershootFalling "Schematic Undershoot - Falling Edge_3" [InNetClass('ram')] p1: maximum=300.0m
UndershootFalling "Schematic Undershoot - Falling Edge_2" [InNetClass('ram')] p2: maximum=300.0m
UndershootFalling "Schematic Undershoot - Falling Edge_1" [InNetClass('ram-clock')] p3: maximum=300.0m
UndershootFalling "Schematic Undershoot - Falling Edge" [InNetClass('ram-clock')] p4: maximum=300.0m
UndershootRising "Schematic Undershoot - Rising Edge_3" [InNetClass('ram')] p1: maximum=300.0m
UndershootRising "Schematic Undershoot - Rising Edge_2" [InNetClass('ram')] p2: maximum=300.0m
UndershootRising "Schematic Undershoot - Rising Edge_1" [InNetClass('ram-clock')] p3: maximum=300.0m
UndershootRising "Schematic Undershoot - Rising Edge" [InNetClass('ram-clock')] p4: maximum=300.0m
Width [All] p1: maxlimit=5 minlimit=0.1 preferedwidth=0.2 midlayer4_prefwidth=0.1 midlayer6_prefwidth=0.1 minimp=50.000000 maximp=50.000000 favimp=50.000000
13 further rules are at their usual default settings.

## Classes and differential pairs
net class ram: DRAM_A0_0 DRAM_A0_1 DRAM_A0_2 DRAM_A0_3 DRAM_A0_4 DRAM_A0_5 DRAM_A0_6 DRAM_A0_7 DRAM_A0_8 DRAM_A0_9 DRAM_A0_10 DRAM_A0_11 DRAM_A0_12 DRAM_A0_13 DRAM_A1_0 DRAM_A1_1 DRAM_A1_2 DRAM_A1_3 DRAM_A1_4 DRAM_A1_5 DRAM_A1_6 DRAM_A1_7 DRAM_A1_8 DRAM_A1_9 DRAM_A1_10 DRAM_A1_11 DRAM_A1_12 DRAM_A1_13 DRAM_BA0_0 DRAM_BA0_1 DRAM_BA1_0 DRAM_BA1_1 DRAM_C\A\S\0 DRAM_C\A\S\1 DRAM_C\K\0 DRAM_C\K\1 DRAM_C\S\0 DRAM_C\S\1 DRAM_CK0 DRAM_CK0_FB DRAM_CK1 DRAM_CK1_FB DRAM_CKE0 DRAM_CKE1 DRAM_D0_0 DRAM_D0_1 DRAM_D0_2 DRAM_D0_3 DRAM_D0_4 DRAM_D0_5 DRAM_D0_6 DRAM_D0_7 DRAM_D0_8 DRAM_D0_9 DRAM_D0_10 DRAM_D0_11 DRAM_D0_12 DRAM_D0_13 DRAM_D0_14 DRAM_D0_15 DRAM_D1_0 DRAM_D1_1 DRAM_D1_2 DRAM_D1_3 DRAM_D1_4 DRAM_D1_5 DRAM_D1_6 DRAM_D1_7 DRAM_D1_8 DRAM_D1_9 DRAM_D1_10 DRAM_D1_11 DRAM_D1_12 DRAM_D1_13 DRAM_D1_14 DRAM_D1_15 DRAM_LDM0 DRAM_LDM1 DRAM_LDQS0 DRAM_LDQS1 DRAM_R\A\S\0 DRAM_R\A\S\1 DRAM_UDM0 DRAM_UDM1 DRAM_UDQS0 DRAM_UDQS1 DRAM_W\E\0 DRAM_W\E\1
net class ram-clock: DRAM_C\K\0 DRAM_C\K\1 DRAM_CK0 DRAM_CK0_FB DRAM_CK1 DRAM_CK1_FB
net class FLASH_A[0..23]: FLASH_A0 FLASH_A1 FLASH_A2 FLASH_A3 FLASH_A4 FLASH_A5 FLASH_A6 FLASH_A7 FLASH_A8 FLASH_A9 FLASH_A10 FLASH_A11 FLASH_A12 FLASH_A13 FLASH_A14 FLASH_A15 FLASH_A16 FLASH_A17 FLASH_A18 FLASH_A19 FLASH_A20 FLASH_A21 FLASH_A22 FLASH_A23
net class DRAM_D1_[0..15]: DRAM_D1_0 DRAM_D1_1 DRAM_D1_2 DRAM_D1_3 DRAM_D1_4 DRAM_D1_5 DRAM_D1_6 DRAM_D1_7 DRAM_D1_8 DRAM_D1_9 DRAM_D1_10 DRAM_D1_11 DRAM_D1_12 DRAM_D1_13 DRAM_D1_14 DRAM_D1_15
net class DRAM_D0_[0..15]: DRAM_D0_0 DRAM_D0_1 DRAM_D0_2 DRAM_D0_3 DRAM_D0_4 DRAM_D0_5 DRAM_D0_6 DRAM_D0_7 DRAM_D0_8 DRAM_D0_9 DRAM_D0_10 DRAM_D0_11 DRAM_D0_12 DRAM_D0_13 DRAM_D0_14 DRAM_D0_15 DRAM_DQ0 DRAM_DQ1 DRAM_DQ2 DRAM_DQ3 DRAM_DQ4 DRAM_DQ5 DRAM_DQ6 DRAM_DQ7 DRAM_DQ8 DRAM_DQ9 DRAM_DQ10 DRAM_DQ11 DRAM_DQ12 DRAM_DQ13 DRAM_DQ14 DRAM_DQ15
component class ethernet: C1_ETH C2_ETH C3_ETH C4_ETH C5_ETH C6_ETH C7_ETH C8_ETH C9_ETH C10_ETH C11_ETH C12_ETH C13_ETH D1_ETH JP1_ETH L1_ETH Q1_ETH R1_ETH R2_ETH R3_ETH R4_ETH R5_ETH R9_ETH R10_ETH R11_ETH R12_ETH R13_ETH R14_ETH R15_ETH R16_ETH U1_ETH
component class fpga1: C1_FP1 C2_FP1 Q1_FP1 R1_FP1 R2_FP1 U1
component class fpga2: C1_FP2 C2_FP2
component class fpga-config: C1_CNF C2_CNF C3_CNF C4_CNF C5_CNF C6_CNF C7_CNF C8_CNF C9_CNF C10_CNF C11_CNF C12_CNF C13_CNF C14_CNF C15_CNF C16_CNF C17_CNF C18_CNF C19_CNF C20_CNF C21_CNF C22_CNF C23_CNF C24_CNF C25_CNF C26_CNF C27_CNF C28_CNF C29_CNF C30_CNF C31_CNF C32_CNF C33_CNF C34_CNF C35_CNF C36_CNF C37_CNF C38_CNF C39_CNF C40_CNF C41_CNF C42_CNF C43_CNF C44_CNF C45_CNF C46_CNF C47_CNF C48_CNF C49_CNF C50_CNF C51_CNF C52_CNF C53_CNF C54_CNF C55_CNF C56_CNF C57_CNF C58_CNF C59_CNF C60_CNF C61_CNF C62_CNF C63_CNF C64_CNF C65_CNF C66_CNF C67_CNF C68_CNF C69_CNF C70_CNF C71_CNF C72_CNF C73_CNF C74_CNF C75_CNF C76_CNF C77_CNF C78_CNF C79_CNF C80_CNF C81_CNF C82_CNF C83_CNF C84_CNF C85_CNF C86_CNF C87_CNF C88_CNF C89_CNF C90_CNF C91_CNF C92_CNF C93_CNF C94_CNF C95_CNF C96_CNF C97_CNF C98_CNF R1_CNF R2_CNF R3_CNF R4_CNF
component class io-bus: C2_IO FB1_IO FB2_IO JP1_IO JP2_IO R1_IO R2_IO
component class jtag: JP1_JTAG JP2_JTAG R1_JTAG R2_JTAG R3_JTAG
component class power: C1_PWR C2_PWR C3_PWR C4_PWR C5_PWR C6_PWR C7_PWR C8_PWR C9_PWR C10_PWR C11_PWR C12_PWR C13_PWR C14_PWR C15_PWR C16_PWR C17_PWR C18_PWR C19_PWR C20_PWR C21_PWR C22_PWR L1_PWR R1_PWR R2_PWR R3_PWR R4_PWR R5_PWR R6_PWR R7_PWR R8_PWR TP1_PWR U1_PWR U2_PWR
component class switches: D1_SW D2_SW D3_SW D4_SW R1_SW R2_SW R3_SW R4_SW R5_SW R6_SW R7_SW R8_SW R9_SW R10_SW R11_SW R12_SW R13_SW R14_SW R15_SW R16_SW S1_SW S2_SW S3_SW S4_SW S5_SW
component class usb: C1_USB C2_USB C3_USB C4_USB C5_USB C6_USB C7_USB C8_USB C9_USB C10_USB C11_USB C12_USB C13_USB FB1_USB JP1_USB Q1_USB R1_USB R2_USB R3_USB R4_USB R5_USB R6_USB S1_USB U1_USB U2_USB
net class D[0..15]: D0 D1 D2 D3 D4 D5 D6 D7 D8 D9 D10 D11 D12 D13 D14 D15
net class ENCODER[0..7]: ENCODER0 ENCODER1 ENCODER2 ENCODER3 ENCODER4 ENCODER5 ENCODER6 ENCODER7
net class PWM[0..7]: PWM0 PWM1 PWM2 PWM3 PWM4 PWM5 PWM6 PWM7
net class SWITCH[0..3]: SWITCH0 SWITCH1 SWITCH2 SWITCH3
component class io-bus2: JP1_IO2 JP2_IO2
component class spi-flash: U1_SPI
component class i2c: D1_I2C R1_I2C R2_I2C R3_I2C S1_I2C U1_I2C U2_I2C
net class LED[0..7]: LED0 LED1 LED2 LED3 LED4 LED5 LED6 LED7
net class RXD_[0..3]: RXD_0 RXD_1 RXD_2 RXD_3
net class TXD_[0..3]: TXD_0 TXD_1 TXD_2 TXD_3
net class usb-d: NetJP1_USB_D+ NetJP1_USB_D-
component class dram1: C1_R0 C2_R0 R2_R0 RA1_R0 RA2_R0 RA3_R0 RA4_R0 RA5_R0 RA6_R0 RA7_R0 RA8_R0 RA9_R0 RA10_R0 RA11_R0 U1_R0
component class dram2: C1_R1 C2_R1 R2_R1 RA1_R1 RA2_R1 RA3_R1 RA4_R1 RA5_R1 RA6_R1 RA7_R1 RA8_R1 RA9_R1 RA10_R1 RA11_R1 U1_R1
net class BUTTON[0..2]: BUTTON0 BUTTON1 BUTTON2
net class DRAM_A0_[0..13]: DRAM_A0 DRAM_A0_0 DRAM_A0_1 DRAM_A0_2 DRAM_A0_3 DRAM_A0_4 DRAM_A0_5 DRAM_A0_6 DRAM_A0_7 DRAM_A0_8 DRAM_A0_9 DRAM_A0_10 DRAM_A0_11 DRAM_A0_12 DRAM_A0_13 DRAM_A1 DRAM_A2 DRAM_A3 DRAM_A4 DRAM_A5 DRAM_A6 DRAM_A7 DRAM_A8 DRAM_A9 DRAM_A10 DRAM_A11 DRAM_A12 DRAM_A13
net class DRAM_A1_[0..13]: DRAM_A1_0 DRAM_A1_1 DRAM_A1_2 DRAM_A1_3 DRAM_A1_4 DRAM_A1_5 DRAM_A1_6 DRAM_A1_7 DRAM_A1_8 DRAM_A1_9 DRAM_A1_10 DRAM_A1_11 DRAM_A1_12 DRAM_A1_13 DRAM_A1_14 DRAM_A1_15
component class flash: C1_FL C2_FL C3_FL C4_FL C5_FL C6_FL C7_FL R1_FL R2_FL R3_FL R4_FL U1_FL U2_FL
net class FLASH_D0_[0..15]: FLASH_D0_0 FLASH_D0_1 FLASH_D0_2 FLASH_D0_3 FLASH_D0_4 FLASH_D0_5 FLASH_D0_6 FLASH_D0_7 FLASH_D0_8 FLASH_D0_9 FLASH_D0_10 FLASH_D0_11 FLASH_D0_12 FLASH_D0_13 FLASH_D0_14 FLASH_D0_15
net class FLASH_D1_[0..15]: FLASH_D1_0 FLASH_D1_1 FLASH_D1_2 FLASH_D1_3 FLASH_D1_4 FLASH_D1_5 FLASH_D1_6 FLASH_D1_7 FLASH_D1_8 FLASH_D1_9 FLASH_D1_10 FLASH_D1_11 FLASH_D1_12 FLASH_D1_13 FLASH_D1_14 FLASH_D1_15
net class GPIO1_[0..51]: GPIO1_0 GPIO1_1 GPIO1_2 GPIO1_3 GPIO1_4 GPIO1_5 GPIO1_6 GPIO1_7 GPIO1_8 GPIO1_9 GPIO1_10 GPIO1_11 GPIO1_12 GPIO1_13 GPIO1_14 GPIO1_15 GPIO1_16 GPIO1_17 GPIO1_18 GPIO1_19 GPIO1_20 GPIO1_21 GPIO1_22 GPIO1_23 GPIO1_24 GPIO1_25 GPIO1_26 GPIO1_27 GPIO1_28 GPIO1_29 GPIO1_30 GPIO1_31 GPIO1_32 GPIO1_33 GPIO1_34 GPIO1_35 GPIO1_36 GPIO1_37 GPIO1_38 GPIO1_39 GPIO1_40 GPIO1_41 GPIO1_42 GPIO1_43 GPIO1_44 GPIO1_45 GPIO1_46 GPIO1_47 GPIO1_48 GPIO1_49 GPIO1_50 GPIO1_51
net class GPIO2_[0..115]: GPIO2_0 GPIO2_1 GPIO2_2 GPIO2_3 GPIO2_4 GPIO2_5 GPIO2_6 GPIO2_7 GPIO2_8 GPIO2_9 GPIO2_10 GPIO2_11 GPIO2_12 GPIO2_13 GPIO2_14 GPIO2_15 GPIO2_16 GPIO2_17 GPIO2_18 GPIO2_19 GPIO2_20 GPIO2_21 GPIO2_22 GPIO2_23 GPIO2_24 GPIO2_25 GPIO2_26 GPIO2_27 GPIO2_28 GPIO2_29 GPIO2_30 GPIO2_31 GPIO2_32 GPIO2_33 GPIO2_34 GPIO2_35 GPIO2_36 GPIO2_37 GPIO2_38 GPIO2_39 GPIO2_40 GPIO2_41 GPIO2_42 GPIO2_43 GPIO2_44 GPIO2_45 GPIO2_46 GPIO2_47 GPIO2_48 GPIO2_49 GPIO2_50 GPIO2_51 GPIO2_52 GPIO2_53 GPIO2_54 GPIO2_55 GPIO2_56 GPIO2_57 GPIO2_58 GPIO2_59 GPIO2_60 GPIO2_61 GPIO2_62 GPIO2_63 GPIO2_64 GPIO2_65 GPIO2_66 GPIO2_67 GPIO2_68 GPIO2_69 GPIO2_70 GPIO2_71 GPIO2_72 GPIO2_73 GPIO2_74 GPIO2_75 GPIO2_76 GPIO2_77 GPIO2_78 GPIO2_79 GPIO2_80 GPIO2_81 GPIO2_82 GPIO2_83 GPIO2_84 GPIO2_85 GPIO2_86 GPIO2_87 GPIO2_88 GPIO2_89 GPIO2_90 GPIO2_91 GPIO2_92 GPIO2_93 GPIO2_94 GPIO2_95 GPIO2_96 GPIO2_97 GPIO2_98 GPIO2_99 GPIO2_100 GPIO2_101 GPIO2_102 GPIO2_103 GPIO2_104 GPIO2_105 GPIO2_106 GPIO2_107 GPIO2_108 GPIO2_109 GPIO2_110 GPIO2_111 GPIO2_112 GPIO2_113 GPIO2_114 GPIO2_115
differential pair usb_data: +NetJP1_USB_D+ -NetJP1_USB_D-
differential pair DRAM_clk0: +DRAM_CK0 -DRAM_C\K\0
differential pair DRAM_clk1: +DRAM_CK1 -DRAM_C\K\1
differential pair eth_rd: +RD+ -RD-
differential pair eth_td: +TD+ -TD-

## Components (designator, comment, footprint, x,y, rotation, side; value= is the part's Value field where it differs from the comment)
1 "" CC-License 29.4,1.375 r0 top
C1_CNF "Cap" 0805 9.125,25.85 r270 top
C1_ETH "Cap" 0402#1 81.025,35.1 r90 bottom
C1_FL "Cap" 0402#1 47.275,13.625 r90 bottom
C1_FP1 "Cap" 0402#1 48.8,31.3 r0 top
C1_FP2 "Cap" 0402#1 48.122,48.481 r90 top
C1_PWR "Cap" 0402#1 20.3,4.875 r180 bottom
C1_R0 "Cap" 0402#1 66.959,40.591 r180 bottom
C1_R1 "Cap" 0402#1 67.061,17.346 r180 bottom
C1_USB "C" CC3216-1206#1 80.775,6.425 r180 top
C2_CNF "Cap" 0805 9.1,42.775 r90 top
C2_ETH "Cap" 0402#1 83.95,37.925 r0 bottom
C2_FL "Cap" 0402#1 33.6,17.775 r0 top
C2_FP1 "Cap" 0402#1 48.8,32.275 r180 top
C2_FP2 "Cap" 0402#1 48.128,45.661 r90 top
C2_IO "Cap Pol3" D 24.049,20.396 r0 top
C2_PWR "Cap" 0402#1 19.7,7.6 r90 top
C2_R0 "Cap" 0402#1 66.959,41.516 r180 bottom
C2_R1 "Cap" 0402#1 67.061,18.376 r180 bottom
C2_USB "C0402" 0402#1 72.85,34.85 r0 top
C3_CNF "Cap" 0805 9.125,20.525 r270 top
C3_ETH "Cap" 0402#1 73.3,51.1 r270 bottom
C3_FL "Cap" 0402#1 30.8,19.3 r0 top
C3_PWR "Cap" 0402#1 19.525,4.525 r90 top
C3_USB "C0402" 0402#1 69.125,34.85 r180 top
C4_CNF "Cap" 0805 30.225,15.175 r270 top
C4_ETH "Cap" 0402#1 77.025,42.25 r180 top
C4_FL "Cap" 1206 45.981,22.244 r270 bottom
C4_PWR "Cap" CC3225-1210 25.875,1.675 r180 top
C4_USB "C0402" 0402#1 70.65,15.075 r270 bottom
C5_CNF "Cap" 0805 9.15,6.175 r90 top
C5_ETH "Cap" 0402#1 73.925,45.15 r180 bottom
C5_FL "Cap" 0402#1 33.581,19.294 r0 top
C5_PWR "Cap" 1210 24.1,11.175 r180 top
C5_USB "Cap" 0805 82.675,29.125 r90 bottom
C6_CNF "Cap" 0805 55.675,29.9 r90 top
C6_ETH "Cap" 0402#1 79.95,41.45 r270 bottom
C6_FL "Cap" 0402#1 45.6,10.9 r90 bottom
C6_PWR "Cap" 0402#1 26.3,7.625 r180 bottom
C6_USB "Cap" 0402#1 82.275,25.25 r270 bottom
C7_CNF "Cap" 0402#1 9.55,6.8 r270 bottom
C7_ETH "Cap" 0402#1 81.025,38.025 r90 bottom
C7_FL "Cap" 0402#1 47.275,10.9 r90 bottom
C7_PWR "T492B" B 31.65,11.482 r180 top
C7_USB "Cap" 0402#1 82.275,22.425 r90 bottom
C8_CNF "Cap" 0402#1 33.6,13.75 r0 top
C8_ETH "Cap" 0402#1 75.825,38.25 r90 top
C8_PWR "Cap" 1206 41.795,11.721 r90 bottom
C8_USB "Cap" 0402#1 79,19.625 r0 bottom
C9_CNF "Cap" 0402#1 9.425,10.525 r0 bottom
C9_ETH "Cap" 0402#1 74.45,47.9 r180 top
C9_PWR "Cap" 0805 20.175,2.35 r0 bottom
C9_USB "Cap" 0402#1 82.325,32.625 r90 bottom
C10_CNF "Cap" 0402#1 42.775,1.9 r0 bottom
C10_ETH "Cap" 0402#1 69.225,47.85 r180 top
C10_PWR "Cap" 1206 60.675,44.05 r0 top
C10_USB "Cap" 0402#1 80.475,28.45 r90 bottom
C11_CNF "Cap" 0402#1 43.95,10.9 r90 bottom
C11_ETH "Cap" 0402#1 84.7,44.225 r270 bottom
C11_PWR "Cap" 0402#1 60.746,34.825 r270 top
C11_USB "Cap" 0402#1 74.3,16.525 r270 bottom
C12_CNF "Cap" 0402#1 58.025,10.25 r270 top
C12_ETH "Cap" 0402#1 84.706,47.722 r270 bottom
C12_PWR "Cap" 0402#1 57.65,30.7 r90 top
C12_USB "Cap" 0402#1 84.075,19.625 r0 bottom
C13_CNF "Cap" 0402#1 9.4,12.125 r0 bottom
C13_ETH "Cap" 1206 82.85,40.3 r180 bottom
C13_PWR "Cap" 0402#1 42.15,6.35 r0 bottom
C13_USB "Cap" 0402#1 81.55,19.625 r0 bottom
C14_CNF "Cap" 0402#1 60.175,39.7 r0 top
C14_PWR "Cap" 0402#1 55.75,33.05 r180 top
C15_CNF "Cap" 0402#1 31.625,1.9 r0 bottom
C15_PWR "Cap" 0402#1 60.729,37.812 r270 top
C16_CNF "Cap" 0402#1 9.425,3.475 r0 bottom
C16_PWR "Cap" 0402#1 54.3,6.375 r0 bottom
C17_CNF "Cap" 0402#1 9.425,9.05 r0 bottom
C17_PWR "Cap" 1206 60.65,41.975 r0 top
C18_CNF "Cap" 0402#1 60.2,31.525 r0 top
C18_PWR "Cap" 0402#1 60.2,33.125 r180 top
C19_CNF "Cap" 0402#1 54.175,1.9 r0 bottom
C19_PWR "Cap" 0402#1 55.675,36.225 r0 top
C20_CNF "Cap" 0402#1 44.175,7.95 r180 bottom
C20_PWR "Cap" 0402#1 58.204,35.775 r270 top
C21_CNF "Cap" 0402#1 47.275,16.125 r90 bottom
C21_PWR "Cap" 0402#1 50.575,40.825 r270 top
C22_CNF "Cap" 0402#1 18.925,35.05 r90 bottom
C22_PWR "Cap" 0402#1 20.325,7.075 r180 bottom
C23_CNF "Cap" 0402#1 45.6,18.65 r90 bottom
C24_CNF "Cap" 0402#1 44.294,24.136 r90 bottom
C25_CNF "Cap" 0402#1 28.825,51.2 r0 bottom
C26_CNF "Cap" 0402#1 18.925,30.3 r270 bottom
C27_CNF "Cap" 0402#1 9.2,50.625 r180 bottom
C28_CNF "Cap" 0402#1 24.9,52.775 r180 bottom
C29_CNF "Cap" 0402#1 21.8,53.375 r180 top
C30_CNF "Cap" 0402#1 25.075,52.775 r180 top
C31_CNF "Cap" 0402#1 47.275,18.65 r90 bottom
C32_CNF "Cap" 0402#1 43.95,16.125 r90 bottom
C33_CNF "Cap" 0402#1 45.6,16.125 r90 bottom
C34_CNF "Cap" 0402#1 43.95,18.65 r90 bottom
C35_CNF "Cap" 0402#1 30.75,17.775 r0 top
C36_CNF "Cap" 0402#1 57.825,33.35 r90 top
C37_CNF "Cap" 0402#1 55.7,33.975 r180 top
C38_CNF "Cap" 0402#1 9.425,44.275 r0 bottom
C39_CNF "Cap" 0402#1 9.45,39.525 r0 bottom
C40_CNF "Cap" 0402#1 33.6,16.75 r0 top
C41_CNF "Cap" 0402#1 27.5,52.775 r180 top
C42_CNF "Cap" 0402#1 24.975,51.2 r180 bottom
C43_CNF "Cap" 0402#1 45.6,13.625 r90 bottom
C44_CNF "Cap" 0402#1 29.775,52.775 r180 bottom
C45_CNF "Cap" 1206 41.764,20.215 r90 bottom
C46_CNF "Cap" 1206 31.05,21.325 r180 top
C47_CNF "Cap" 1206 38.425,52.725 r180 top
C48_CNF "Cap" 0805 48.7,37.55 r270 top
C49_CNF "Cap" 0805 34.375,22.15 r90 top
C50_CNF "Cap" 0805 21.85,52.925 r0 bottom
C51_CNF "Cap" 0402#1 28.991,23.359 r180 top
C52_CNF "Cap" 0402#1 18.897,43.074 r90 top
C53_CNF "Cap" 0402#1 44.325,52.7 r180 bottom
C54_CNF "Cap" 0402#1 48.922,41.472 r270 top
C55_CNF "Cap" 0402#1 41.225,24.15 r90 bottom
C56_CNF "Cap" 0402#1 35.925,33.95 r0 bottom
C57_CNF "Cap" 0402#1 35.925,40.95 r0 bottom
C58_CNF "Cap" 0402#1 30.95,34.95 r180 bottom
C59_CNF "Cap" 0402#1 30.95,40.95 r180 bottom
C60_CNF "Cap" 0402#1 29.925,52.775 r180 top
C61_CNF "Cap" 0402#1 18.931,35.66 r90 top
C62_CNF "Cap" 0402#1 18.923,39.841 r270 top
C63_CNF "Cap" 0402#1 34.825,52.7 r180 top
C64_CNF "Cap" 0402#1 41.925,30.95 r180 bottom
C65_CNF "Cap" 0402#1 40.925,43.95 r180 bottom
C66_CNF "Cap" 0402#1 31.9,23.375 r180 top
C67_CNF "Cap" 1206 52.925,28.325 r270 top
C68_CNF "Cap" 0805 55.675,25.825 r90 top
C69_CNF "Cap" 0805 51.439,34.151 r90 top
C70_CNF "Cap" 0805 9.1,47.575 r270 top
C71_CNF "Cap" 0805 60.951,18.348 r180 top
C72_CNF "Cap" 0402#1 51.101,37.684 r90 top
C73_CNF "Cap" 0402#1 51.104,27.611 r90 top
C74_CNF "Cap" 0402#1 9.05,38.225 r90 top
C75_CNF "Cap" 0402#1 26.275,23.375 r0 top
C76_CNF "Cap" 0402#1 18.5,52.525 r270 top
C77_CNF "Cap" 0402#1 18.929,32.379 r270 top
C78_CNF "Cap" 0402#1 43.95,13.625 r90 bottom
C79_CNF "Cap" 0402#1 41.65,52.775 r0 bottom
C80_CNF "Cap" 0402#1 32.25,52.775 r180 bottom
C81_CNF "Cap" 0402#1 47.868,42.454 r270 top
C82_CNF "Cap" 0402#1 47.951,34.049 r270 top
C83_CNF "Cap" 0402#1 48.85,25.175 r90 top
C84_CNF "Cap" 0402#1 44.3,21.675 r90 bottom
C85_CNF "Cap" 0402#1 47.875,26.075 r270 top
C86_CNF "Cap" 0402#1 20.075,23.375 r0 top
C87_CNF "Cap" 0402#1 18.925,25.675 r90 top
C88_CNF "Cap" 0402#1 18.925,28.475 r90 top
C89_CNF "Cap" 0402#1 18.9,49.725 r270 top
C90_CNF "Cap" 0402#1 21.325,52.375 r0 top
C91_CNF "Cap" 0402#1 27.346,52.776 r180 bottom
C92_CNF "Cap" 0402#1 34.7,52.775 r180 bottom
C93_CNF "Cap" 0402#1 47.15,52.25 r270 top
C94_CNF "Cap" 0402#1 44.425,52.775 r180 top
C95_CNF "Cap" 0402#1 44.925,29.95 r180 bottom
C96_CNF "Cap" 0402#1 42.925,44.95 r0 bottom
C97_CNF "Cap" 0402#1 36.925,38.95 r0 bottom
C98_CNF "Cap" 0402#1 36.925,36.95 r0 bottom
D1_ETH "1211C-LED" stan-led4 83.75,41.675 r270 top
D1_I2C "1211C-LED" stan-led4 79,1.65 r0 top
D1_SW "1211C-LED" stan-led4 48.575,2 r0 top
D2_SW "1211C-LED" stan-led4 48.575,6.075 r0 top
D3_SW "1211C-LED" stan-led4 37,2 r0 top
D4_SW "1211C-LED" stan-led4 37,6.075 r0 top
FB1_IO "FERRITE-BEAD" 0603 9.35,34.9 r90 bottom
FB1_USB "FERRITE-BEAD" 0603 72.8,8.8 r270 bottom
FB2_IO "FERRITE-BEAD" 0603 9.325,30.075 r90 bottom
Fiducial11 "" FIDUCIAL1MM#1 49.525,52.5 r270 top
Fiducial12 "" FIDUCIAL1MM#1 73.575,9.75 r270 top
Fiducial13 "" FIDUCIAL1MM#2 25.75,2.15 r270 bottom
Fiducial14 "" FIDUCIAL1MM#2 76.925,52.275 r270 bottom
JP1_ETH "M22-2540305" M22-2540305 78.3,45.775 r270 top locked
JP1_IO "AMP-FH-120-Plug" amp_FH_.8mm_120pin_plug 4.45,27.025 r270 bottom
JP1_IO2 "AMP-FH-120-RECEPTABLE-H9-H13" amp_FH_.8mm_120pin_r_H9_H13 14.318,27.026 r270 top
JP1_JTAG "Header 6H" HDR1X6H-90° 78.875,21.975 r90 top locked
JP1_USB "USB-MINIB-SMT" USB_MINI_B_SMD 76.225,11.75 r180 top
JP2_IO "AMP-FH-120-RECEPTABLE-H9-H13" amp_FH_.8mm_120pin_r_H9_H13 4.45,27.025 r270 top
JP2_IO2 "AMP-FH-120-Plug" amp_FH_.8mm_120pin_plug 14.318,27.026 r270 bottom
JP2_JTAG "M22-2040205" M22-2040205 78.3,38.475 r270 top locked
L1_ETH "Inductor" 0603 75.125,43.75 r270 top
L1_PWR "2uH" coil-sd-serie 31.05,5.9 r90 top
Q1_ETH "QUARZ-SMD" AT49 72.075,51.275 r180 top
Q1_FP1 "50MHz" SMD-VX3E 53.8,43.65 r90 top
Q1_USB "QUARZ-SMD" AT49 70.25,31.75 r180 top
R1_CNF "Res2" 0402#1 41.975,52.775 r180 top
R1_ETH "Res2" 0402#1 65.575,47.85 r180 top
R1_FL "Res2" 0402#1 42.15,16.675 r90 bottom
R1_FP1 "Res2" 0402#1 32.375,52.775 r180 top
R1_I2C "Res2" 0402#1 67.05,3.525 r180 bottom
R1_IO "Res2" 0402#2 9.225,25 r90 bottom
R1_JTAG "Res2" 0402#1 80.475,30.95 r270 bottom
R1_PWR "Res2" 0402#1 20.325,5.925 r0 bottom
R1_SW "Res2" 0402#1 49.05,2.975 r90 bottom
R1_USB "Res2" CC3216-1206#2 80.725,6.4 r180 bottom
R2_CNF "Res2" 0402#1 18.9,45.5 r90 bottom
R2_ETH "Res2" 0603 77.425,41.375 r180 bottom
R2_FL "Res2" 0402#1 41.025,15.25 r270 bottom
R2_FP1 "Res2" 0402#1 50.35,43.875 r0 top
R2_I2C "Res2" 0402#1 69.9,3.875 r180 bottom
R2_IO "Res2" 0402#2 9.225,21.8 r270 bottom
R2_JTAG "Res2" 0402#1 80.475,22.425 r270 bottom
R2_PWR "Res2" 0402#1 21.8,3.6 r270 top
R2_R0 "Res2" 0402#1 38.311,51.471 r0 bottom
R2_R1 "Res2" 0402#1 42.75,24.15 r90 bottom
R2_SW "Res2" 0402#1 48.1,2.975 r90 bottom
R2_USB "Res2" 0402#1 79,19.625 r0 top
R3_CNF "Res2" 0402#1 18.9,47 r90 top
R3_ETH "Res2" 0402#1 74.4,46.85 r180 bottom
R3_FL "Res2" 0402#1 22.875,23.35 r0 top
R3_I2C "Res2" 0402#1 71.4,7.9 r90 bottom
R3_JTAG "Res2" 0402#1 80.475,25.25 r270 bottom
R3_PWR "Res2" 0603 21.025,7.325 r270 top
R3_SW "Res2" 0402#1 49.05,6.975 r90 bottom
R3_USB "Res2" 0402#1 82.15,19.625 r0 top
R4_CNF "Res2" 0402#1 58.4,28.65 r180 top
R4_ETH "Res2" 0402#1 73.25,42.325 r90 bottom
R4_FL "Res2" 0402#1 58.125,20.75 r0 top
R4_PWR "Res2" 0603 20.65,4.225 r90 top
R4_SW "Res2" 0402#1 48.1,6.975 r90 bottom
R4_USB "Res2" 0402#1 72.775,20.725 r0 bottom
R5_ETH "Res2" 0402#1 77.025,41.15 r0 top
R5_PWR "Res2" 0402#1 26.3,8.6 r180 bottom
R5_SW "Res2" 0402#1 37.475,2.925 r90 bottom
R5_USB "Res2" 0402#1 70.65,12.275 r270 bottom
R6_PWR "Res2" 0402#1 59.671,34.825 r270 top
R6_SW "Res2" 0402#1 36.5,2.925 r90 bottom
R6_USB "Res2" 0402#2 66.825,26.625 r90 top
R7_PWR "Res2" 0402#1 59.679,37.812 r270 top
R7_SW "Res2" 0402#1 37.475,7.025 r90 bottom
R8_PWR "Res2" 0402#1 20.325,8.175 r0 bottom
R8_SW "Res2" 0402#1 36.525,7.025 r90 bottom
R9_ETH "Res2" 0603 82.575,42.6 r0 bottom
R9_SW "Res2" 0402#1 53.45,3.15 r180 bottom
R10_ETH "Res2" 0402#1 80.7,41.15 r180 top
R10_SW "Res2" 0402#1 53.45,4.95 r180 bottom
R11_ETH "Res2" 0402#1 80.7,42.175 r180 top
R11_SW "Res2" 0402#1 41.95,3.15 r180 bottom
R12_ETH "Res2" 0603 82.575,45.825 r0 bottom
R12_SW "Res2" 0402#1 41.95,4.975 r180 bottom
R13_ETH "Res2" 0603 82.575,44.325 r0 bottom
R13_SW "Res2" 0402#1 59.3,2.825 r90 bottom
R14_ETH "Res2" 0603 82.575,47.525 r0 bottom
R14_SW "Res2" 0402#1 59.3,6 r270 bottom
R15_ETH "Res2" 0402#1 74.45,46.95 r180 top
R15_SW "Res2" 0402#1 61.4,2.85 r90 bottom
R16_ETH "Res2" 0402#2 70.225,42.125 r180 bottom
R16_SW "Res2" 0402#1 61.4,6 r270 bottom
RA1_R0 "" 1206_ARRAY 49.161,50.996 r0 bottom
RA1_R1 "" 1206_ARRAY 49.161,27.596 r0 bottom
RA2_R0 "" 1206_ARRAY 48.461,47.396 r0 bottom
RA2_R1 "" 1206_ARRAY 48.361,23.996 r0 bottom
RA3_R0 "" 1206_ARRAY 48.261,43.746 r0 bottom
RA3_R1 "" 1206_ARRAY 48.011,20.396 r0 bottom
RA4_R0 "" 1206_ARRAY 48.611,40.146 r0 bottom
RA4_R1 "" 1206_ARRAY 48.561,16.796 r0 bottom
RA5_R0 "" 1206_ARRAY 66.511,50.196 r0 bottom
RA5_R1 "" 1206_ARRAY 66.486,26.646 r0 bottom
RA6_R0 "" 1206_ARRAY 66.334,46.591 r0 bottom
RA6_R1 "" 1206_ARRAY 66.586,23.046 r0 bottom
RA7_R0 "" 1206_ARRAY 66.411,33.471 r0 bottom
RA7_R1 "" 1206_ARRAY 66.386,10.296 r0 bottom
RA8_R0 "" 1206_ARRAY 66.411,37.121 r0 bottom
RA8_R1 "" 1206_ARRAY 66.411,13.896 r0 bottom
RA9_R0 "" 1206_ARRAY 66.409,42.991 r0 bottom
RA9_R1 "" 1206_ARRAY 66.786,19.446 r0 bottom
RA10_R0 "" 1206_ARRAY 49.111,32.446 r0 bottom
RA10_R1 "" 1206_ARRAY 48.736,9.521 r0 bottom
RA11_R0 "" 1206_ARRAY 49.136,36.146 r0 bottom
RA11_R1 "" 1206_ARRAY 48.686,13.171 r0 bottom
S1_I2C "SW-DIP2" MINIDIP2 70.35,6.675 r0 top
S1_SW "Button0" FSM 50.9,1.95 r0 top
S1_USB "Reprogramm Button" FSM 70.275,2.15 r0 top
S2_SW "Button1" FSM 50.925,6 r0 top
S3_SW "Button2" FSM 39.5,1.95 r0 top
S4_SW "Reset Button" FSM 45.95,6 r180 top
S5_SW "SW-DIP4" DIP4 60.15,1.075 r90 top
TP1_PWR "TESTPAD-SMD" TESTPAD-SMD 24.45,15.375 r180 top
U1 "XC3S4000-5FG676C" FG676 33.427,37.949 r180 top locked
U1_ETH "DP83848I" F-QFP7X7-G48/N 69.35,40.975 r90 top locked
U1_FL "JS28FXXXJ3D-75" TSSO14X20-G56 29.325,16.3 r270 bottom locked
U1_I2C "PCA9536" TSSO3X6-G8/X.3 66.325,5.925 r270 bottom
U1_PWR "LTC3412A" QFN16 25.006,5.839 r90 top
U1_R0 "DDR-SDRAM" TSOP66 54.636,31.021 r0 bottom
U1_R1 "DDR-SDRAM" TSOP66 54.636,7.946 r0 bottom
U1_SPI "M25P32" VDFPN8 61.75,24.825 r90 top
U1_USB "EZ-USB FX2LP" QFN8x8 69.9,20.05 r90 top locked
U2_FL "JS28FXXXJ3D-75" TSSO14X20-G56 46.025,16.3 r270 top locked
U2_I2C "24LC128-I/SN" SO-G8 62.225,14.2 r270 top
U2_PWR "LP8340CDT" TO-252 60.075,49.4 r270 top
U2_USB "LTC4411" TSOP-23-5 73.775,4.35 r0 bottom

## Footprints (in the part's own frame and the unit in brackets; to place one, negate y for a bottom-side part, rotate by r counter-clockwise, add the part's x,y. Pads: shape width x height; smd on the part's side, far side on the other; paste and mask are expansions set on the pad)
0402#1 [mm] "Chip Capacitor; Body 1.0 x 0.5 mm (LxW typ)"
  rect 0.9x0.7 smd paste-0.05 mask+0.06: 1(-0.65,0) 2(0.65,0)
  silkscreen extent -1.4,-0.25 -1.4,0.25
0402#2 [mm] "Chip Capacitor; Body 1.0 x 0.5 mm (LxW typ)"
  rect 0.9x0.7 smd paste-0.05: 1(-0.65,0) 2(0.65,0)
  silkscreen extent -1.4,-0.25 -1.4,0.25
0603 [mm] "Chip Capacitor; Body 1.6 x 0.8 mm (LxW typ)"
  rect 1.1x1 smd paste-0.05 mask+0.06: 1(-0.85,0) 2(0.85,0)
  silkscreen extent -1.7,-0.4 -1.7,0.4
0805 [mm] "Chip Capacitor; Body 2.0 x 1.2 mm (LxW typ)"
  rect 1.3x1.5 smd paste-0.05 mask+0.06: 1(-0.95,0) 2(0.95,0)
  silkscreen extent -1.9,-0.65 -1.9,0.65
1206 [mm] "Chip Capacitor; Body 3.2 x 1.6 mm (LxW typ)"
  rect 1.6x1.8 smd paste-0.05 mask+0.06: 1(-1.4,0) 2(1.4,0)
  silkscreen extent -0.3,-0.8 0.3,0.8
1206_ARRAY [mm]
  rect 1.3x0.5 smd paste-0.05 mask+0.06: 1(0,0) 2(0,-0.8) 3(0,-1.6) 4(0,-2.4) 5(2.3,-2.4) 6(2.3,-1.6) 7(2.3,-0.8) 8(2.3,0)
  silkscreen extent 0.2,-2.8 2,0.4
1210 [mm] "Chip Capacitor; Body 3.2 x 2.5 mm (LxW typ)"
  rect 1.6x2.7 smd paste-0.05 mask+0.06: 1(-1.4,0) 2(1.4,0)
  silkscreen extent -0.3,-1.25 0.3,1.25
amp_FH_.8mm_120pin_plug [mm] "AMP Free Height System, 0.8mm, 100 Pin, all Heights, Plug"
  round 1.1 hole 0.8 paste-0.05 mask+0.06: 0(-26.1,0)
  round 1.4 hole 1.1 paste-0.05 mask+0.06: 0(26.1,0)
  rect 0.5x2 smd paste-0.05 mask+0.06: 1(-23.6,2.2) 2(-23.6,-2.2) 3(-22.8,2.2) 4(-22.8,-2.2) 5(-22,2.2) 6(-22,-2.2) 7(-21.2,2.2) 8(-21.2,-2.2) 9(-20.4,2.2) 10(-20.4,-2.2) 11(-19.6,2.2) 12(-19.6,-2.2) 13(-18.8,2.2) 14(-18.8,-2.2) 15(-18,2.2) 16(-18,-2.2) 17(-17.2,2.2) 18(-17.2,-2.2) 19(-16.4,2.2) 20(-16.4,-2.2) 21(-15.6,2.2) 22(-15.6,-2.2) 23(-14.8,2.2) 24(-14.8,-2.2) 25(-14,2.2) 26(-14,-2.2) 27(-13.2,2.2) 28(-13.2,-2.2) 29(-12.4,2.2) 30(-12.4,-2.2) 31(-11.6,2.2) 32(-11.6,-2.2) 33(-10.8,2.2) 34(-10.8,-2.2) 35(-10,2.2) 36(-10,-2.2) 37(-9.2,2.2) 38(-9.2,-2.2) 39(-8.4,2.2) 40(-8.4,-2.2) 41(-7.6,2.2) 42(-7.6,-2.2) 43(-6.8,2.2) 44(-6.8,-2.2) 45(-6,2.2) 46(-6,-2.2) 47(-5.2,2.2) 48(-5.2,-2.2) 49(-4.4,2.2) 50(-4.4,-2.2) 51(-3.6,2.2) 52(-3.6,-2.2) 53(-2.8,2.2) 54(-2.8,-2.2) 55(-2,2.2) 56(-2,-2.2) 57(-1.2,2.2) 58(-1.2,-2.2) 59(-0.4,2.2) 60(-0.4,-2.2) 61(0.4,2.2) 62(0.4,-2.2) 63(1.2,2.2) 64(1.2,-2.2) 65(2,2.2) 66(2,-2.2) 67(2.8,2.2) 68(2.8,-2.2) 69(3.6,2.2) 70(3.6,-2.2) 71(4.4,2.2) 72(4.4,-2.2) 73(5.2,2.2) 74(5.2,-2.2) 75(6,2.2) 76(6,-2.2) 77(6.8,2.2) 78(6.8,-2.2) 79(7.6,2.2) 80(7.6,-2.2) 81(8.4,2.2) 82(8.4,-2.2) 83(9.2,2.2) 84(9.2,-2.2) 85(10,2.2) 86(10,-2.2) 87(10.8,2.2) 88(10.8,-2.2) 89(11.6,2.2) 90(11.6,-2.2) 91(12.4,2.2) 92(12.4,-2.2) 93(13.2,2.2) 94(13.2,-2.2) 95(14,2.2) 96(14,-2.2) 97(14.8,2.2) 98(14.8,-2.2) 99(15.6,2.2) 100(15.6,-2.2) 101(16.4,2.2) 102(16.4,-2.2) 103(17.2,2.2) 104(17.2,-2.2) 105(18,2.2) 106(18,-2.2) 107(18.8,2.2) 108(18.8,-2.2) 109(19.6,2.2) 110(19.6,-2.2) 111(20.4,2.2) 112(20.4,-2.2) 113(21.2,2.2) 114(21.2,-2.2) 115(22,2.2) 116(22,-2.2) 117(22.8,2.2) 118(22.8,-2.2) 119(23.6,2.2) 120(23.6,-2.2)
  silkscreen extent -26.91,-3 26.89,3
amp_FH_.8mm_120pin_r_H9_H13 [mm] "AMP Free Height System, 0.8mm, 120 Pin, 9 or 13mm Heigth, Receptacle"
  round 1.4 hole 1.1 paste-0.05 mask+0.06: 0(-26.1,0)
  round 1.1 hole 0.8 paste-0.05 mask+0.06: 0(26.1,0)
  rect 0.5x2.4 smd paste-0.05 mask+0.06: 1(-23.6,-2.4) 2(-23.6,2.4) 3(-22.8,-2.4) 4(-22.8,2.4) 5(-22,-2.4) 6(-22,2.4) 7(-21.2,-2.4) 8(-21.2,2.4) 9(-20.4,-2.4) 10(-20.4,2.4) 11(-19.6,-2.4) 12(-19.6,2.4) 13(-18.8,-2.4) 14(-18.8,2.4) 15(-18,-2.4) 16(-18,2.4) 17(-17.2,-2.4) 18(-17.2,2.4) 19(-16.4,-2.4) 20(-16.4,2.4) 21(-15.6,-2.4) 22(-15.6,2.4) 23(-14.8,-2.4) 24(-14.8,2.4) 25(-14,-2.4) 26(-14,2.4) 27(-13.2,-2.4) 28(-13.2,2.4) 29(-12.4,-2.4) 30(-12.4,2.4) 31(-11.6,-2.4) 32(-11.6,2.4) 33(-10.8,-2.4) 34(-10.8,2.4) 35(-10,-2.4) 36(-10,2.4) 37(-9.2,-2.4) 38(-9.2,2.4) 39(-8.4,-2.4) 40(-8.4,2.4) 41(-7.6,-2.4) 42(-7.6,2.4) 43(-6.8,-2.4) 44(-6.8,2.4) 45(-6,-2.4) 46(-6,2.4) 47(-5.2,-2.4) 48(-5.2,2.4) 49(-4.4,-2.4) 50(-4.4,2.4) 51(-3.6,-2.4) 52(-3.6,2.4) 53(-2.8,-2.4) 54(-2.8,2.4) 55(-2,-2.4) 56(-2,2.4) 57(-1.2,-2.4) 58(-1.2,2.4) 59(-0.4,-2.4) 60(-0.4,2.4) 61(0.4,-2.4) 62(0.4,2.4) 63(1.2,-2.4) 64(1.2,2.4) 65(2,-2.4) 66(2,2.4) 67(2.8,-2.4) 68(2.8,2.4) 69(3.6,-2.4) 70(3.6,2.4) 71(4.4,-2.4) 72(4.4,2.4) 73(5.2,-2.4) 74(5.2,2.4) 75(6,-2.4) 76(6,2.4) 77(6.8,-2.4) 78(6.8,2.4) 79(7.6,-2.4) 80(7.6,2.4) 81(8.4,-2.4) 82(8.4,2.4) 83(9.2,-2.4) 84(9.2,2.4) 85(10,-2.4) 86(10,2.4) 87(10.8,-2.4) 88(10.8,2.4) 89(11.6,-2.4) 90(11.6,2.4) 91(12.4,-2.4) 92(12.4,2.4) 93(13.2,-2.4) 94(13.2,2.4) 95(14,-2.4) 96(14,2.4) 97(14.8,-2.4) 98(14.8,2.4) 99(15.6,-2.4) 100(15.6,2.4) 101(16.4,-2.4) 102(16.4,2.4) 103(17.2,-2.4) 104(17.2,2.4) 105(18,-2.4) 106(18,2.4) 107(18.8,-2.4) 108(18.8,2.4) 109(19.6,-2.4) 110(19.6,2.4) 111(20.4,-2.4) 112(20.4,2.4) 113(21.2,-2.4) 114(21.2,2.4) 115(22,-2.4) 116(22,2.4) 117(22.8,-2.4) 118(22.8,2.4) 119(23.6,-2.4) 120(23.6,2.4)
  silkscreen extent -26.91,-3.39 26.89,3.41
AT49 [mm] "Crystal, Low Profile SMT"
  rect 5.1x2.1 smd paste-0.05 mask+0.06: 1(-4.75,0) 2(4.75,0)
  silkscreen extent -5.55,-2.4 5.55,2.4
B [mm] "Capacitor, SM Tantalum; Body 3.5 x 2.8 mm (LxW typ)"
  rect 2x2.2 smd paste-0.05 mask+0.06: 1(-1.5,0) 2(1.5,0)
  silkscreen extent -2.83,-1.5 1.85,1.62
CC3216-1206#1 [mm] "Chip Capacitor; Body 3.2 x 1.6 mm (LxW typ)"
  rect 1.6x1.8 smd: 1(-1.4,0) 2(1.4,0)
  silkscreen extent -0.3,-0.8 0.3,0.8
CC3216-1206#2 [mm]
  rect 1.6x1.8 smd paste-0.05 mask+0.06: 1(-1.408,0.005) 2(1.392,0.005)
  silkscreen extent -2.61,-1.3 2.59,1.3
CC3225-1210 [mm] "Chip Capacitor; Body 3.2 x 2.5 mm (LxW typ)"
  rect 1.6x2.7 smd paste-0.05 mask+0.06: 1(-1.4,0) 2(1.4,0)
  silkscreen extent -0.3,-1.25 0.3,1.25
CC-License [mm]
coil-sd-serie [mm] "SD Series Coils from Coiltronics"
  rect 5.15x1 smd paste-0.05 mask+0.06: 1(0,2.475) 2(-0.05,-2.475)
  Top Layer region: -2.6,-1.725 -1.6,-1.725 -1.6,-1.575 -2.6,-1.575
  Top Layer region: -2.6,-1.975 -1.025,-1.975 -1.025,-1.725 -2.6,-1.725
  Top Layer region: 2.525,-1.575 1.525,-1.575 1.525,-1.725 2.525,-1.725
  Top Layer region: 2.523,-1.727 0.948,-1.727 0.948,-1.977 2.523,-1.977
  Top Layer region: 2.575,1.725 1.575,1.725 1.575,1.575 2.575,1.575
  Top Layer region: 2.575,1.975 1.025,1.975 1.025,1.725 2.575,1.725
  Top Layer region: -2.575,1.575 -1.575,1.575 -1.575,1.725 -2.575,1.725
  Top Layer region: -2.575,1.725 -1,1.725 -1,1.975 -2.575,1.975
  Top Layer lines w0.254: -0.302,2.373 cw(c-2.47,4.541) -2.47,1.475 ; 0.302,2.373 ccw(c2.47,4.541) 2.47,1.475 ; -2.495,-1.475 cw(c-2.495,-4.541) -0.327,-2.373 ; 2.42,-1.475 ccw(c2.42,-4.541) 0.252,-2.373
  silkscreen extent -2.6,-2.6 2.6,2.6
D [mm] "Capacitor, SM Tantalum; Body 7.3 x 4.3 mm (LxW typ)"
  rect 2.6x2.4 smd paste-0.05 mask+0.06: 1(-3.2,0) 2(3.2,0)
  silkscreen extent -4.57,-2.3 3.8,2.42
DIP4 [mm]
  rect 1.5x1.1 smd paste-0.05 mask+0.06: 1(0,0)
  oval 1.5x1.1 smd paste-0.05 mask+0.06: 2(0,-2.54) 3(0,-5.08) 4(0,-7.62) 5(8.9,-7.62) 6(8.9,-5.08) 7(8.9,-2.54) 8(8.9,0)
  silkscreen extent 1.25,-8.89 7.32,1.28
F-QFP7X7-G48/N [mm]
  rect 1.55x0.3 smd paste-0.05 mask+0.06: 1(-4.175,2.75) 2(-4.175,2.25) 3(-4.175,1.75) 4(-4.175,1.25) 5(-4.175,0.75) 6(-4.175,0.25) 7(-4.175,-0.25) 8(-4.175,-0.75) 9(-4.175,-1.25) 10(-4.175,-1.75) 11(-4.175,-2.25) 12(-4.175,-2.75) 25(4.175,-2.75) 26(4.175,-2.25) 27(4.175,-1.75) 28(4.175,-1.25) 29(4.175,-0.75) 30(4.175,-0.25) 31(4.175,0.25) 32(4.175,0.75) 33(4.175,1.25) 34(4.175,1.75) 35(4.175,2.25) 36(4.175,2.75)
  rect 0.3x1.55 smd paste-0.05 mask+0.06: 13(-2.75,-4.175) 14(-2.25,-4.175) 15(-1.75,-4.175) 16(-1.25,-4.175) 17(-0.75,-4.175) 18(-0.25,-4.175) 19(0.25,-4.175) 20(0.75,-4.175) 21(1.25,-4.175) 22(1.75,-4.175) 23(2.25,-4.175) 24(2.75,-4.175) 37(2.75,4.175) 38(2.25,4.175) 39(1.75,4.175) 40(1.25,4.175) 41(0.75,4.175) 42(0.25,4.175) 43(-0.25,4.175) 44(-0.75,4.175) 45(-1.25,4.175) 46(-1.75,4.175) 47(-2.25,4.175) 48(-2.75,4.175)
  silkscreen extent -4.3,-3 3,3.57